# Altium PCB AMPURR.PcbDoc (part 1 of 6)
Units mm, origin at the board's own origin, x right, y up, seen from the top; angles counter-clockwise.
Board outline 100 x 100 mm, 4 copper layers (Top Layer, GND, VDD, Bottom Layer), stack 1.586 mm thick; 522 components, 281 nets, 1527 pads, 2431 vias.
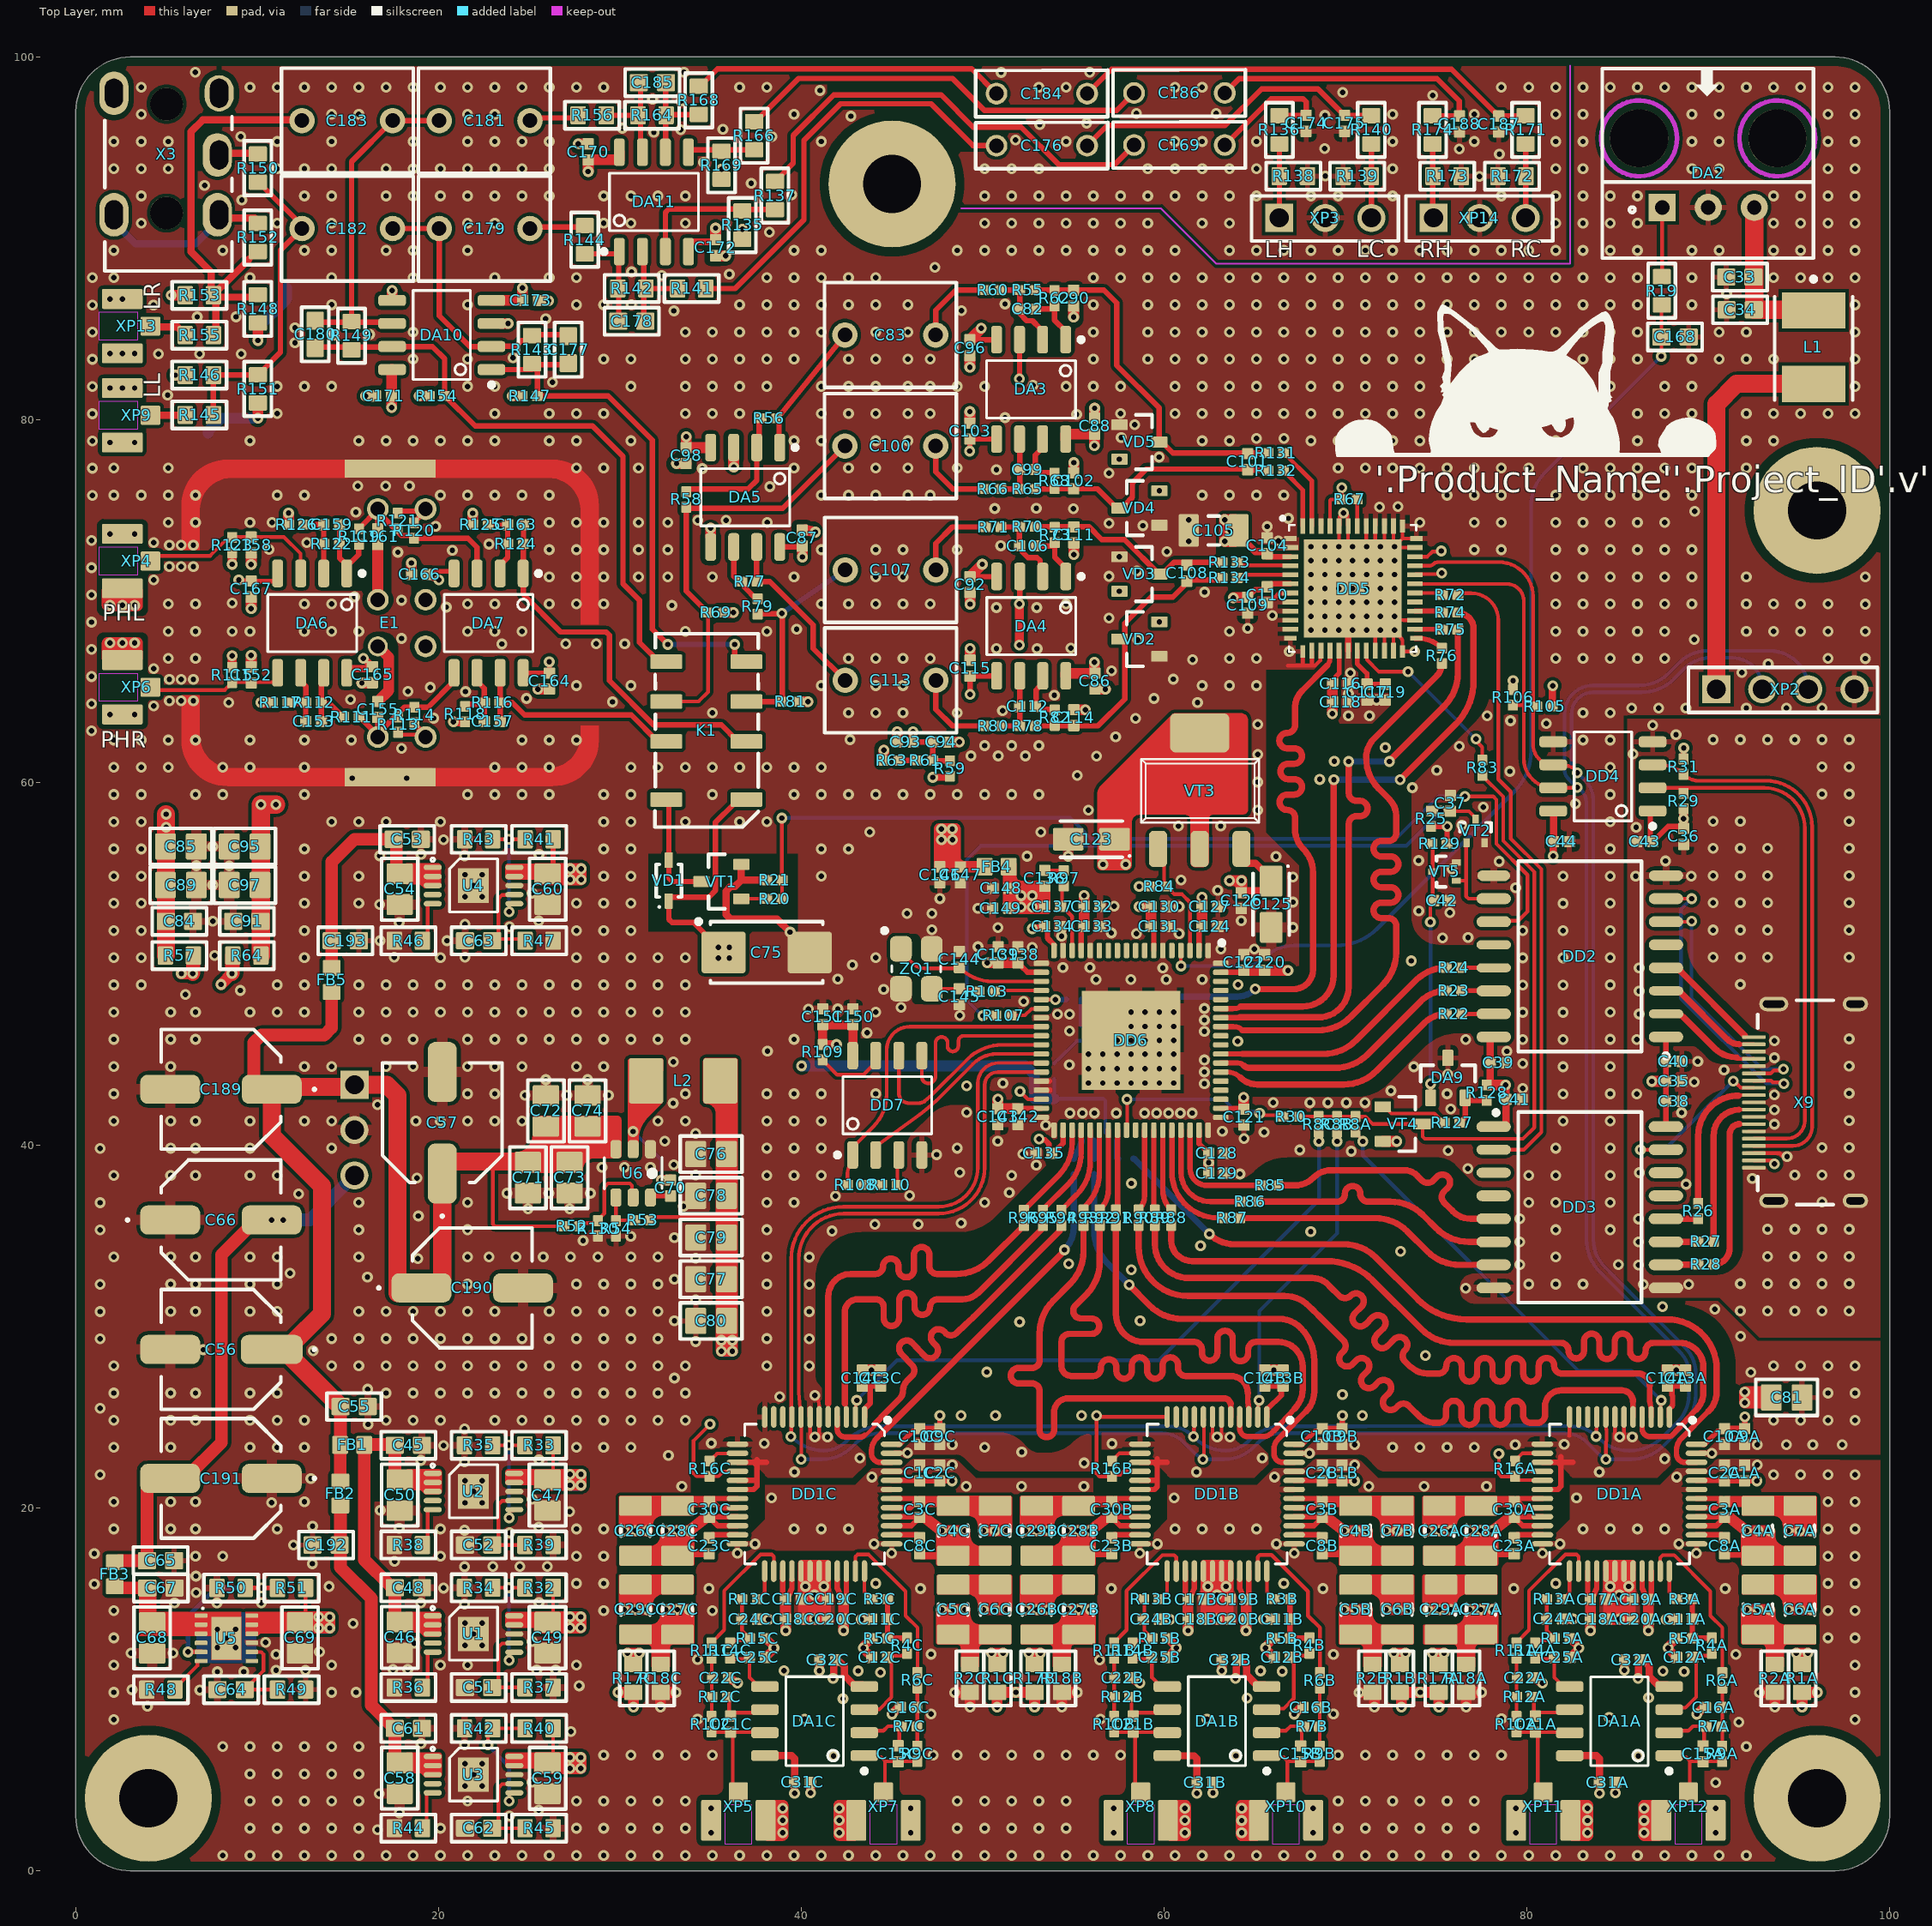
[diagram p0: Top Layer view]
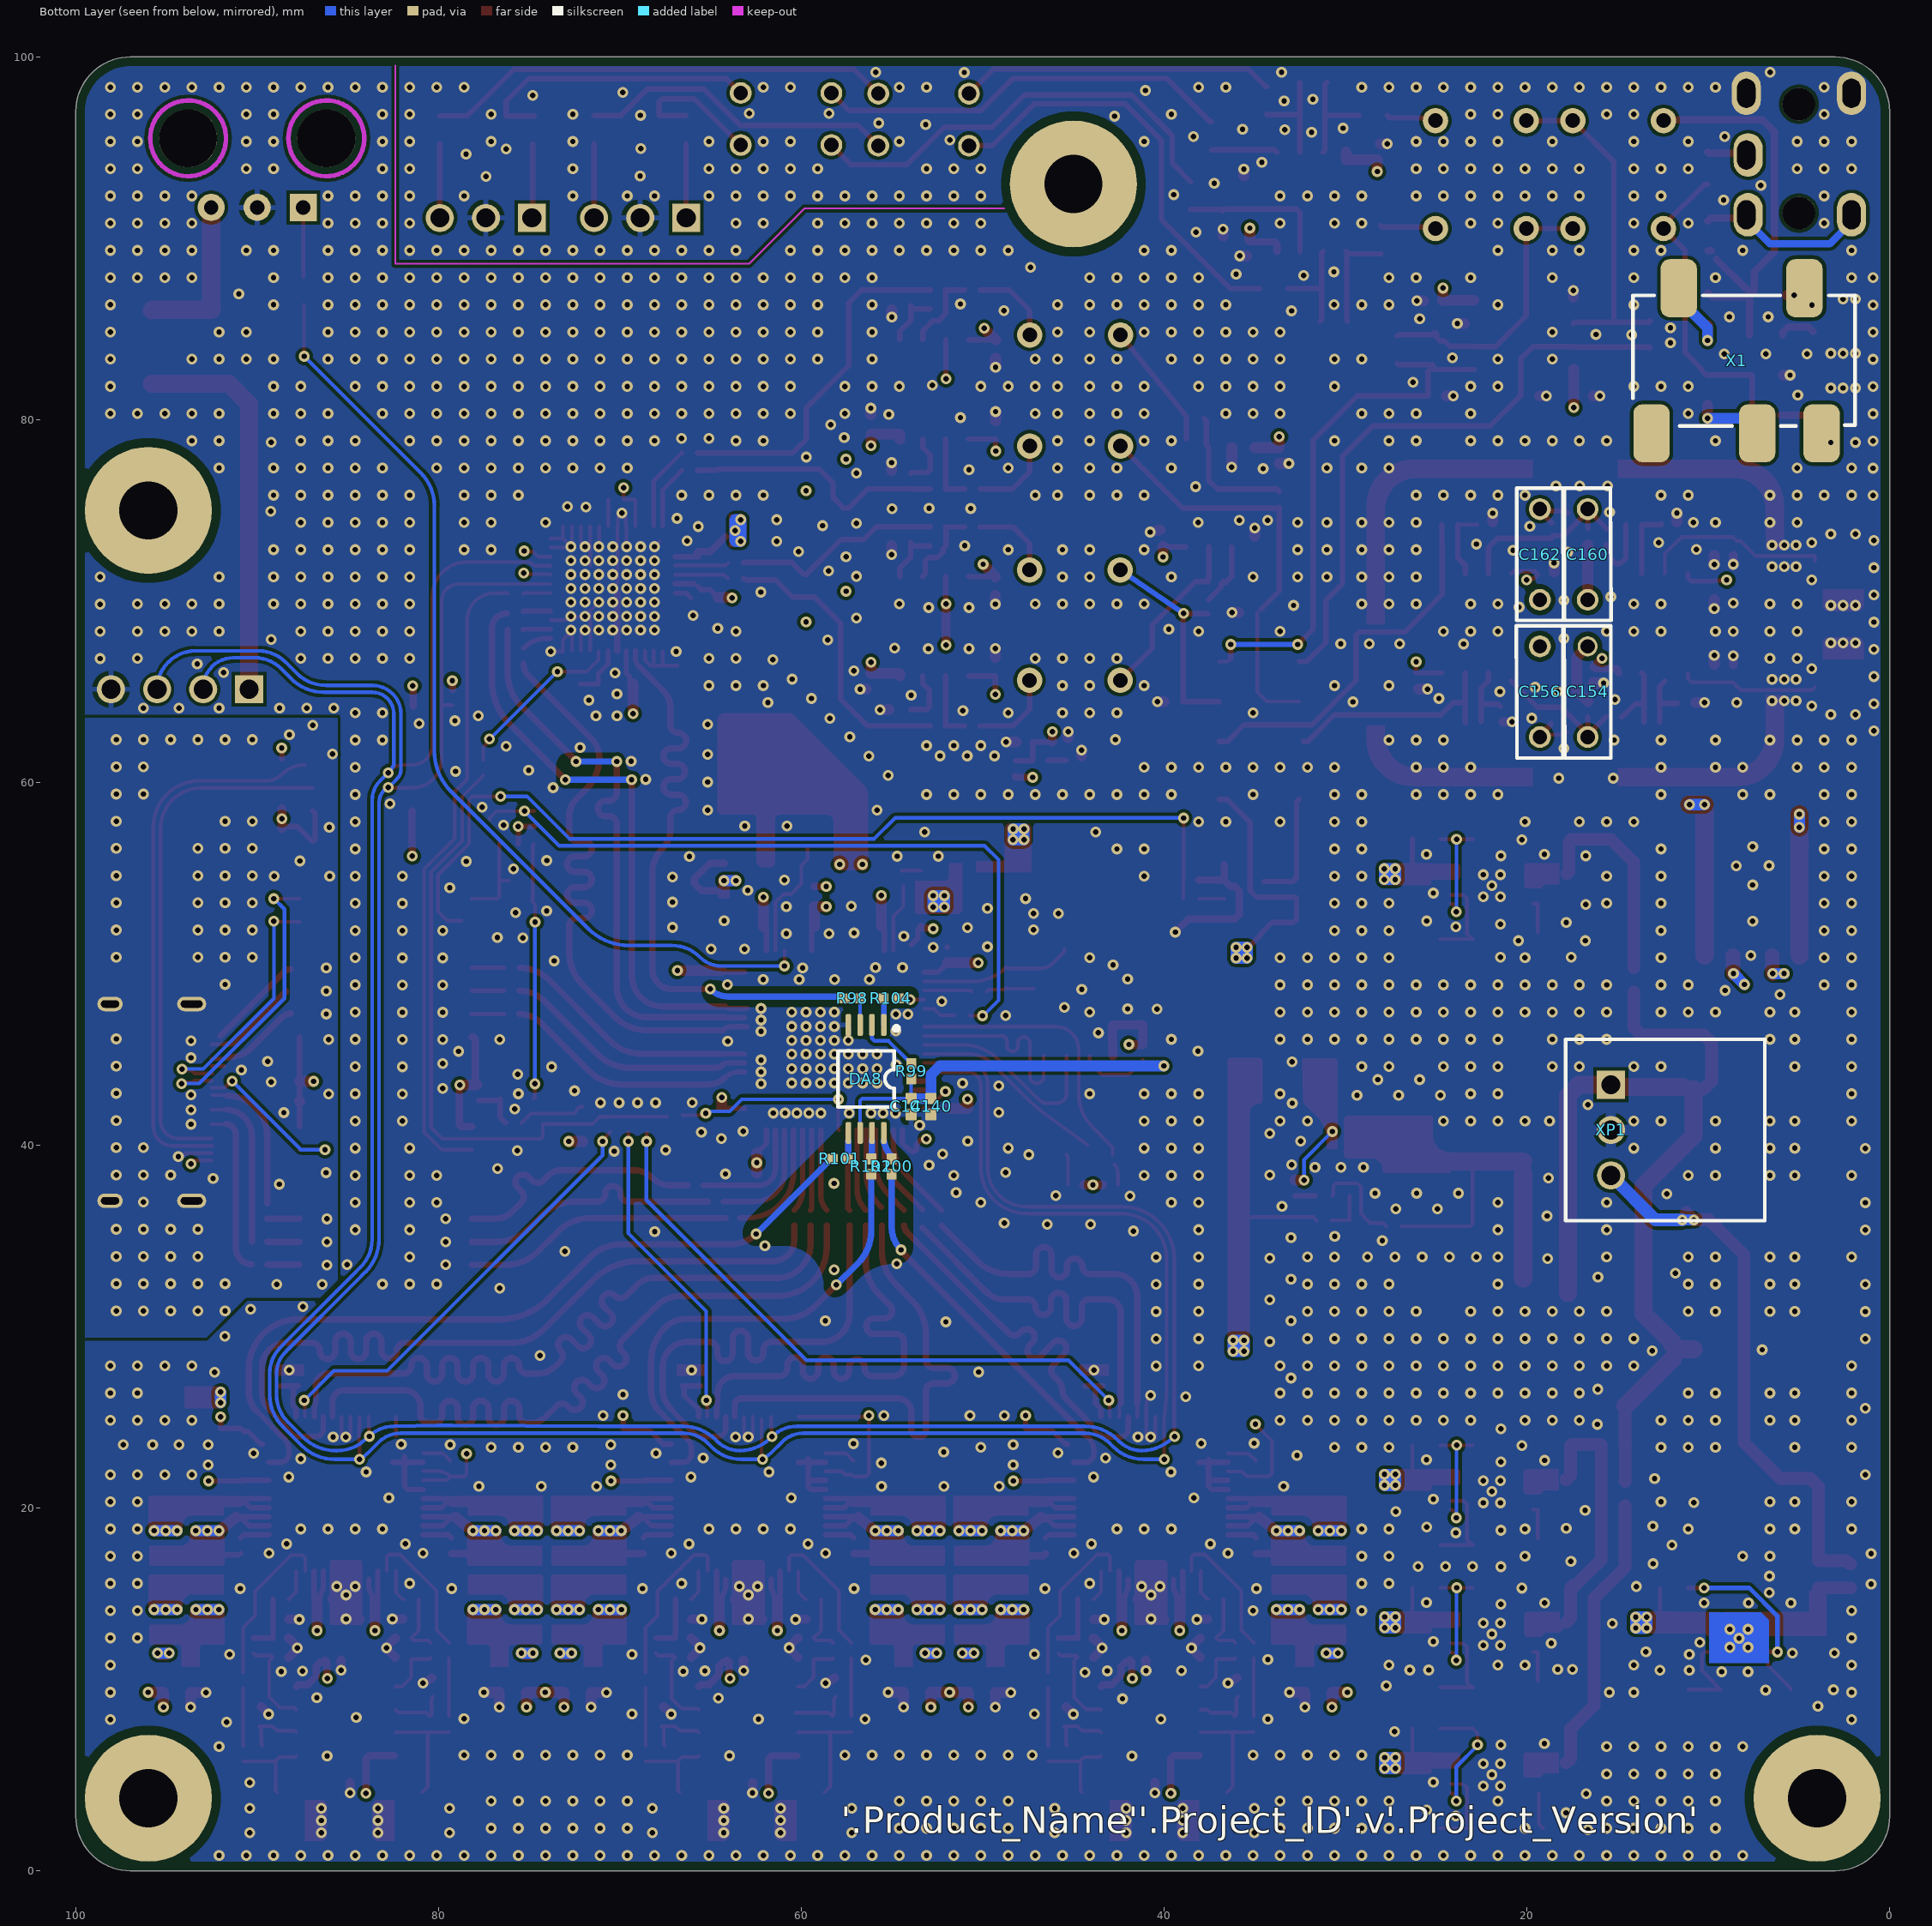
[diagram p1: Bottom Layer view, seen from below]
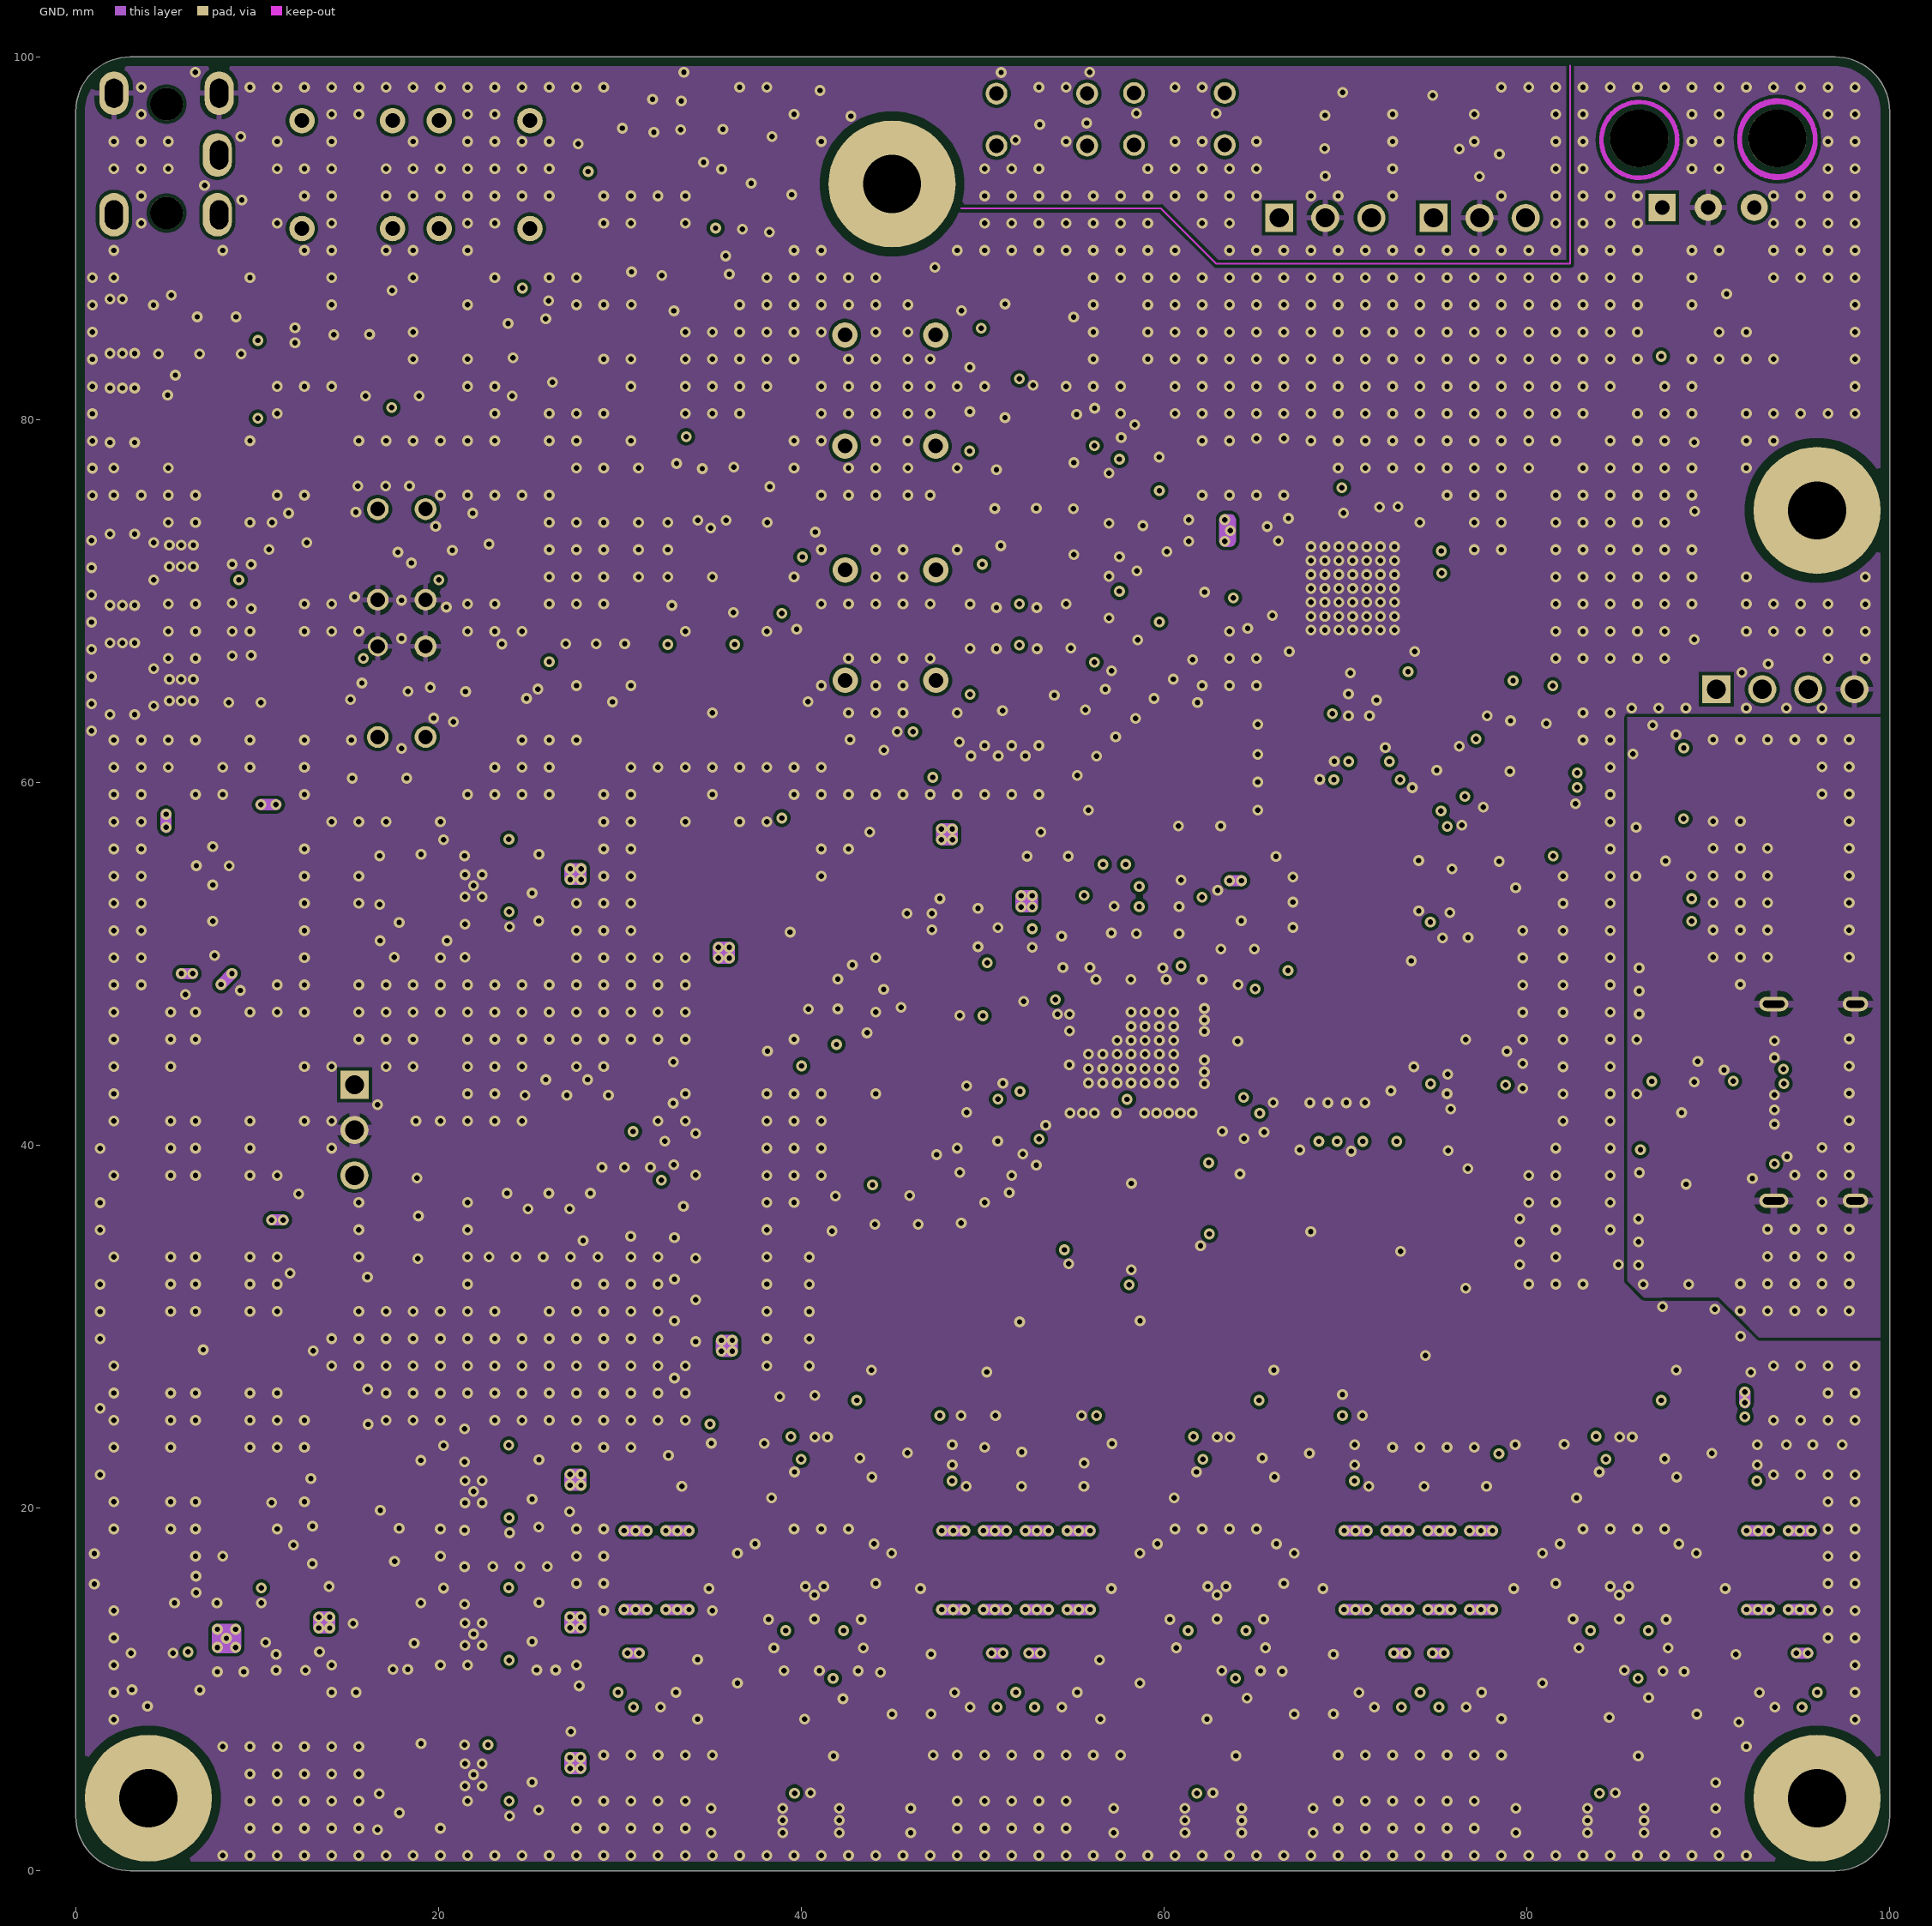
[diagram p2: GND]
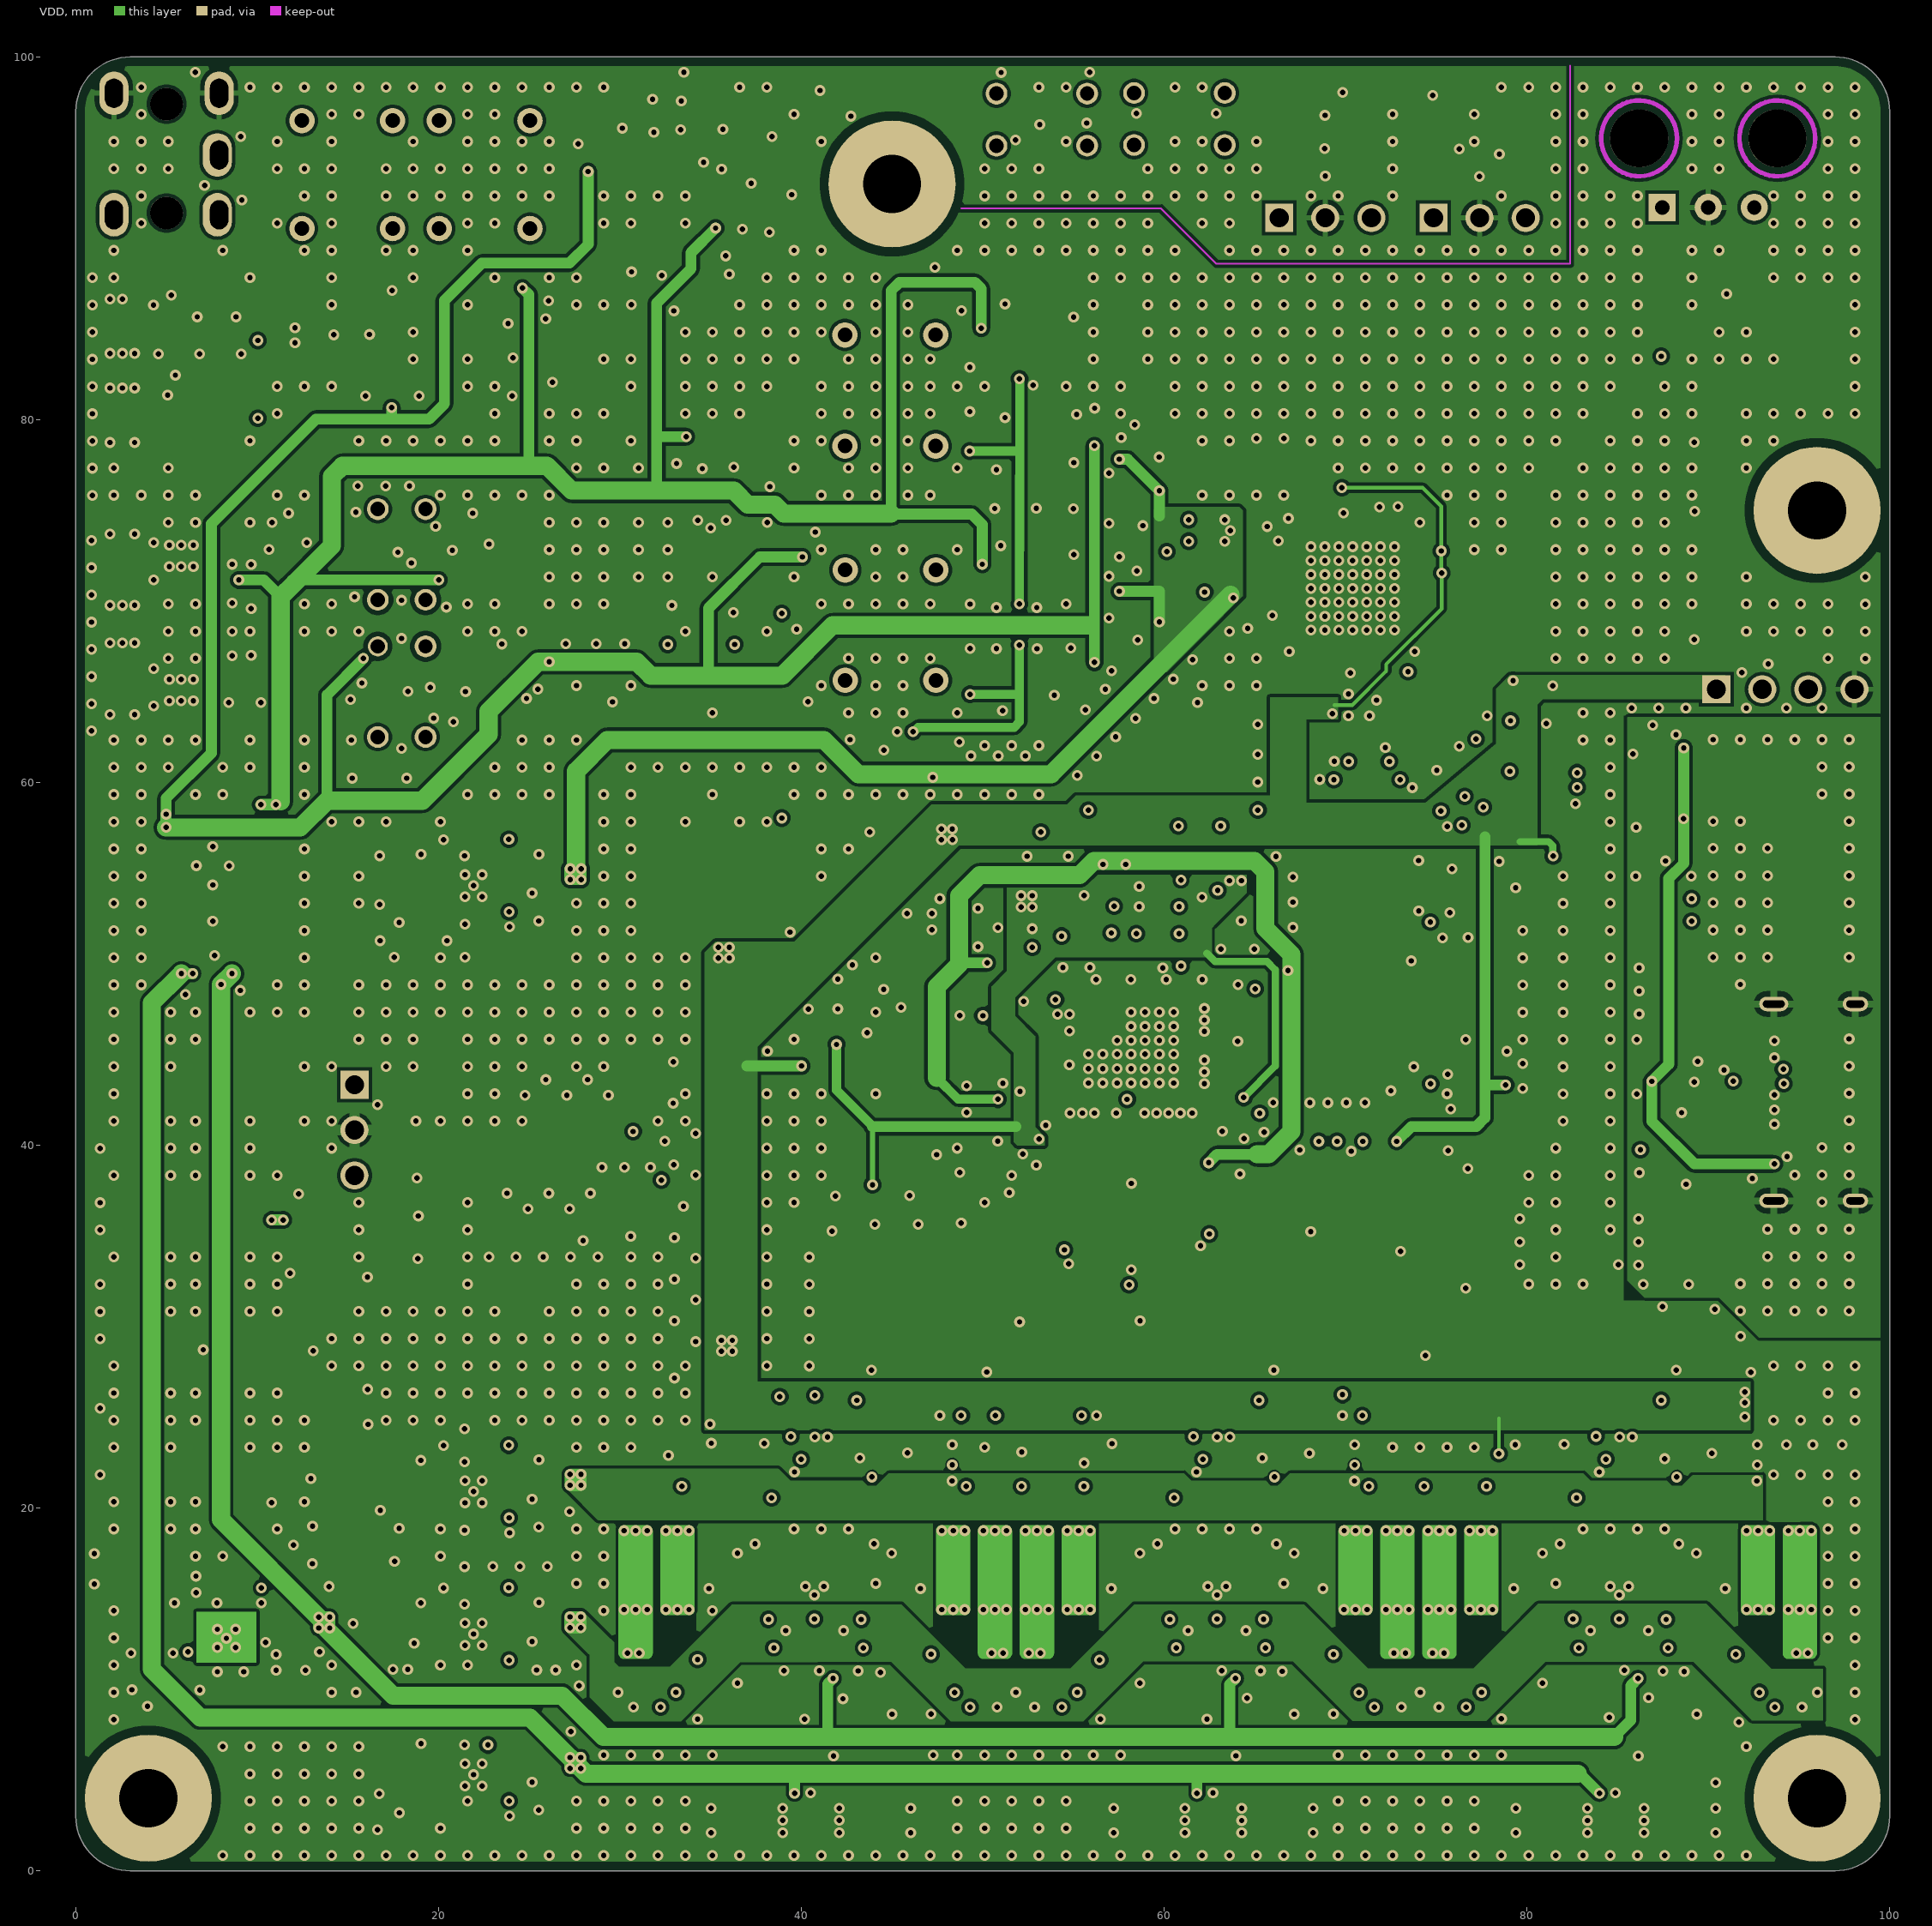
[diagram p3: VDD]
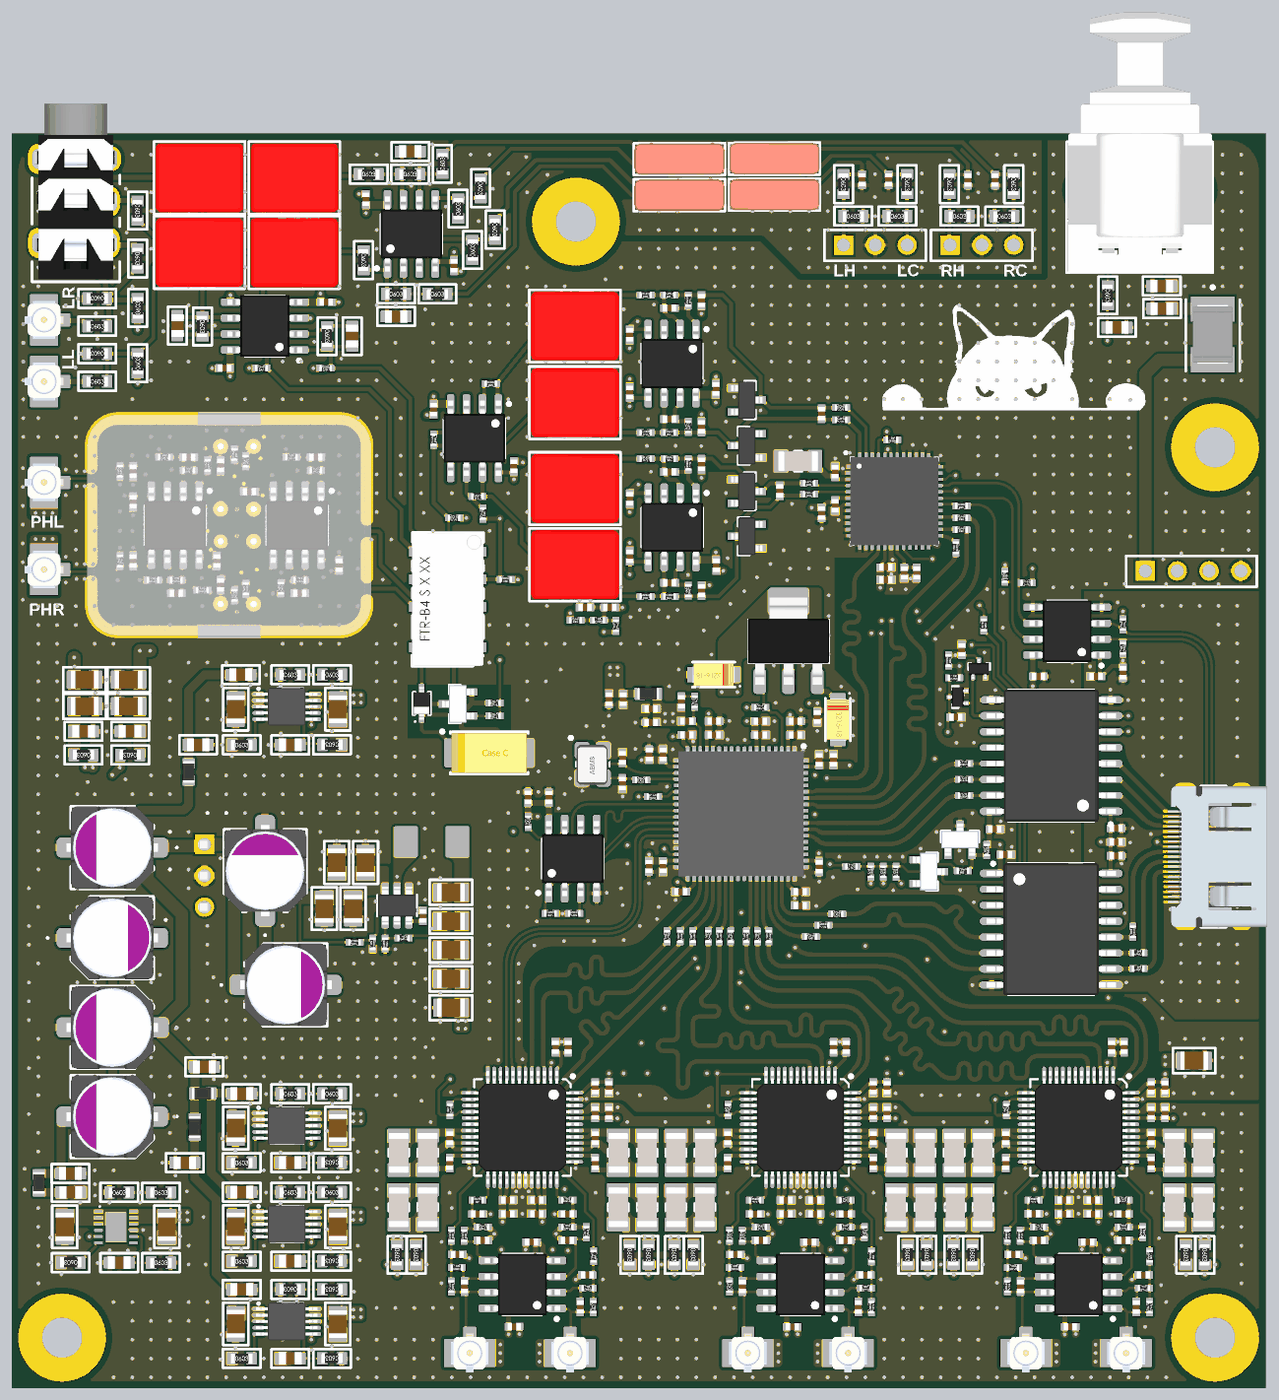
[diagram p8: 3D render of the assembled board from above, using the file's embedded part models]
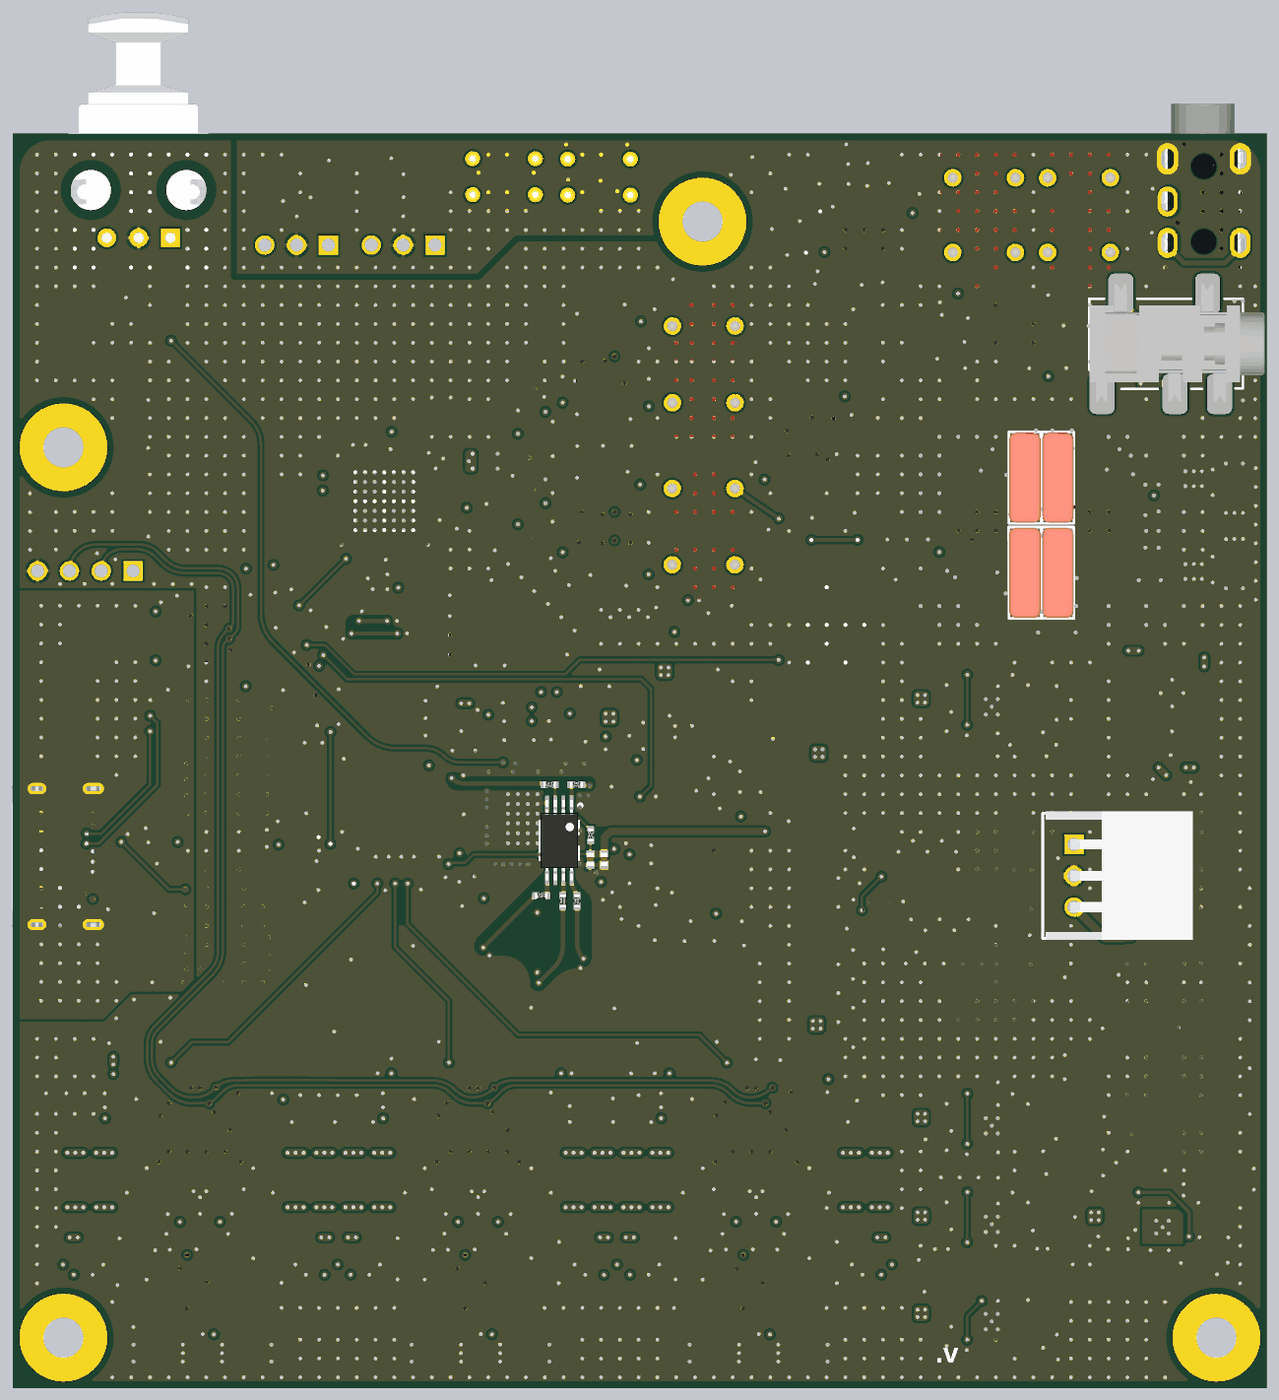
[diagram p9: 3D render of the assembled board from below, using the file's embedded part models]

## Layer stack, top to bottom
Top Solder: solder mask 0.02, Solder Resist, Dk 3.5
Top Layer: signal copper 0.035
Dielectric 2: prepreg 0.2104, PP-006, Dk 4.5
GND: signal copper 0.0152
Dielectric 1: dielectric 1.065, FR-4, Dk 4.5
VDD: signal copper 0.0152
Dielectric 3: prepreg 0.2104, PP-006, Dk 4.5
Bottom Layer: signal copper 0.035
Bottom Solder: solder mask 0.02, Solder Resist, Dk 3.5

## Board outline
0,3 0,97 cw(c3,97) 3,100 97,100 cw(c97,97) 100,97 100,3 cw(c97,3) 97,0 3,0 cw(c3,3)

## Design rules (kind name [scope] priority, off if disabled: settings)
BoardOutlineClearance [All] p1: gap=0.5 ignorepadtopadclearanceinfootprint=FALSE
Clearance [All] p1: gap=0.18 ignorepadtopadclearanceinfootprint=FALSE
Clearance MiddleVoltage [InNetClass('MiddleVoltage')] p2: gap=0.5 ignorepadtopadclearanceinfootprint=FALSE except(0: Arc-Hole Track-Hole SMDPad-Hole THPad-Hole Via-Hole Fill-Hole Poly-Hole Region-Hole Text-Hole; 0.2: Arc-Text Track-Text SMDPad-Text THPad-Text Via-Text Fill-Text Poly-Text Region-Text Text-Text)
Clearance HighVoltage [InNetClass('HighVoltage')] p3: gap=1 ignorepadtopadclearanceinfootprint=FALSE except(0: Arc-Hole Track-Hole SMDPad-Hole THPad-Hole Via-Hole Fill-Hole Poly-Hole Region-Hole Text-Hole; 0.2: Arc-Text Track-Text SMDPad-Text THPad-Text Via-Text Fill-Text Poly-Text Region-Text Text-Text)
ComponentClearance [All] p1: gap=0.1 collisioncheckmode=3 verticalgap=0.1 showdistances=TRUE
Height [All] p1: minheight=0 maxheight=40 prefheight=12.7
HoleSize [All] p1: absolutevalues=TRUE maxlimit=12 minlimit=0.3 maxpercent=80.000 minpercent=20.000
HoleToHoleClearance [All] p1: gap=0.25 allowstackedmicrovias=TRUE
MatchedLengths I2S5 [InNetClass('I2S5')] p1: tolerance=0.3 checknetsindiffpair=FALSE checkdiffpairvsdiffpair=TRUE checkxsignals=TRUE checkothers=TRUE
MatchedLengths QSPI [InNetClass('QSPI')] p2: tolerance=0.1 checknetsindiffpair=FALSE checkdiffpairvsdiffpair=TRUE checkxsignals=TRUE checkothers=TRUE
MatchedLengths I2S4 [InNetClass('I2S4')] p3: tolerance=0.3 checknetsindiffpair=FALSE checkdiffpairvsdiffpair=TRUE checkxsignals=TRUE checkothers=TRUE
MatchedLengths I2S3 [InNetClass('I2S3')] p4: tolerance=0.3 checknetsindiffpair=FALSE checkdiffpairvsdiffpair=TRUE checkxsignals=TRUE checkothers=TRUE
MatchedLengths I2S2 [InNetClass('I2S2')] p5: tolerance=0.3 checknetsindiffpair=FALSE checkdiffpairvsdiffpair=TRUE checkxsignals=TRUE checkothers=TRUE
MatchedLengths I2S1 [InNetClass('I2S1')] p6: tolerance=0.3 checknetsindiffpair=FALSE checkdiffpairvsdiffpair=TRUE checkxsignals=TRUE checkothers=TRUE
MatchedLengths I2S0 [InNetClass('I2S0')] p7: tolerance=0.3 checknetsindiffpair=FALSE checkdiffpairvsdiffpair=TRUE checkxsignals=TRUE checkothers=TRUE
MinimumSolderMaskSliver [All] p1: minsoldermaskwidth=0.1
NetAntennae [All] p1: netantennaetolerance=2
PlaneClearance [All] p1: clearance=0.3
PlaneConnect PlaneConnectMiddleCurrent [InNetClass('MiddleCurrent')] p1: planeconnectstyle=Relief reliefexpansion=0.508 reliefentries=4 reliefconductorwidth=0.5 reliefairgap=0.3
PlaneConnect PlaneHighCurrent [InNetClass('HighCurrent')] p2: planeconnectstyle=Relief reliefexpansion=0.508 reliefentries=4 reliefconductorwidth=0.5 reliefairgap=0.35
PlaneConnect [All] p3: planeconnectstyle=Relief reliefexpansion=0.508 reliefentries=4 reliefconductorwidth=0.3 reliefairgap=0.3
PolygonConnect PolygonConnectMiddleCurrent [All vs InNetClass('MiddleCurrent')] p1: connectstyle=Relief reliefconductorwidth=0.4 reliefentries=4 polygonreliefangle="90 Angle" airgapwidth=0.3
PolygonConnect PolygonHighCurrent [InNetClass('HighCurrent')] p2: connectstyle=Relief reliefconductorwidth=0.5 reliefentries=4 polygonreliefangle="90 Angle" airgapwidth=0.3
PolygonConnect PolygonConnect_Keepout [(ObjectKind = 'Track') And (Layer = 'KeepOutLayer')] p3: connectstyle=Direct reliefconductorwidth=0.254 reliefentries=4 polygonreliefangle="90 Angle" airgapwidth=0.254
PolygonConnect PolygonConnect_Via [IsVia] p4: connectstyle=Direct reliefconductorwidth=0.254 reliefentries=4 polygonreliefangle="90 Angle" airgapwidth=0.254
PolygonConnect [All] p5: thpad.connectstyle=Relief thpad.reliefconductorwidth=0.3 thpad.reliefentries=4 thpad.polygonreliefangle="90 Angle" thpad.airgapwidth=0.25 smdpad.connectstyle=Relief smdpad.reliefconductorwidth=0.3 smdpad.reliefentries=4 smdpad.polygonreliefangle="90 Angle" smdpad.airgapwidth=0.25 via.connectstyle=Direct via.reliefconductorwidth=0.3 via.reliefentries=4 via.polygonreliefangle="90 Angle" via.airgapwidth=0.3
RoutingCorners [All] p1: cornerstyle=45-Degree minsetback=1 maxsetback=3
RoutingVias Power [InNetClass('Power')] p1: holewidth=0.8 width=1.5 viastyle="Through Hole" minholewidth=0.5 minwidth=1 maxholewidth=1.2 maxwidth=3
RoutingVias [All] p2: holewidth=0.3 width=0.6 viastyle="Through Hole" minholewidth=0.2 minwidth=0.3 maxholewidth=3 maxwidth=8
SilkToSilkClearance [All] p1: silktosilkclearance=0
SilkToSolderMaskClearance [IsPad] p1: minsilkscreentomaskgap=0.05 clearancetoexposedcopper=TRUE
SolderMaskExpansion SolderMaskExpansion_VIA [IsVia] p1: expansion=-3 istentingtop=TRUE useseparateexpansions=TRUE expansionbottom=-3 istentingbottom=TRUE
SolderMaskExpansion [All] p2: expansion=0.05 istentingtop=FALSE
Width Width_50_r [InNetClass('I2S0') or InNetClass('I2S1') or InNetClass('I2S2') or InNetClass('I2S3') or InNetClass('I2S4') or InNetClass('MCLK')] p1: maxlimit=0.4 minlimit=0.1 preferedwidth=0.35 toplayer_minwidth=0.2 midlayer1_prefwidth=0.268 midlayer2_prefwidth=0.268 bottomlayer_minwidth=0.2 impedanceprofiledriven=TRUE impedanceprofileid={838E95F1-A316-4909-9744-1A738FEB77C5} impedanceprofilevalue=50.000000 minimp=50.000000 maximp=50.000000 favimp=50.000000
Width Width_ANT [InNetClass('Anthenna')] p2: maxlimit=1.641 minlimit=0.2 preferedwidth=1.641
Width WidthMiddleCurrent [InNetClass('MiddleCurrent')] p3: maxlimit=2 minlimit=0.35 preferedwidth=0.5
Width WidthHighCurrent [InNetClass('HighCurrent')] p4: maxlimit=5 minlimit=0.5 preferedwidth=1
19 further rules are at their usual default settings.

## Classes and differential pairs
component class U_LINE_PREAMP: C169 C170 C171 C172 C173 C174 C175 C176 C177 C178 C179 C180 C181 C182 C183 C184 C185 C186 C187 C188 DA10 DA11 DA? R135 R136 R137 R138 R139 R140 R141 R142 R143 R144 R145 R146 R147 R148 R149 R150 R151 R152 R153 R154 R155 R156 R164 R166 R168 R169 R171 R172 R173 R174 X1 X3 XP3 XP9 XP13 XP14
net class I2S3: DAC_BCK_3 DAC_DIN_3 DAC_LRCK_3
net class MCLK: MCLK
net class QSPI: SPI_MISO_M SPI_MOSI_M SPI_SCLK_M
net class I2S4: IN2_BCLK IN2_LRCLK IN2_SDATA NetDD5_16
net class I2S2: DAC_BCK_2 DAC_DIN_2 DAC_LRCK_2 NetDD1A_46
net class I2S1: DAC_BCK_1 DAC_DIN_1 DAC_LRCK_1 NetDD1B_46
net class I2S0: DAC_BCK_0 DAC_DIN_0 DAC_LRCK_0 NetDD1C_46
net class I2S5: IN1_BCLK IN1_LRCLK IN1_SDATA
channel class DAC_AK4493SEQ: U_DAC_AK4493SEQA U_DAC_AK4493SEQB U_DAC_AK4493SEQC
component class U_POWER: C45 C46 C47 C48 C49 C50 C51 C52 C53 C54 C55 C56 C57 C58 C59 C60 C61 C62 C63 C64 C65 C66 C67 C68 C69 C70 C71 C72 C73 C74 C75 C76 C77 C78 C79 C80 C81 C189 C190 C191 C192 C193 FB1 FB2 FB3 FB5 L2 R32 R33 R34 R35 R36 R37 R38 R39 R40 R41 R42 R43 R44 R45 R46 R47 R48 R49 R50 R51 R52 R53 R54 R130 U1 U2 U3 U4 U5 U6
component class U_PHONO_PREAMP: C152 C153 C154 C155 C156 C157 C158 C159 C160 C161 C162 C163 C164 C165 C166 C167 DA6 DA7 E1 R111 R112 R113 R114 R115 R116 R117 R118 R119 R120 R121 R122 R123 R124 R125 R126
component class U_DAC_AK4493SEQC: C1C C2C C3C C4C C5C C6C C7C C8C C9C C10C C11C C12C C13C C14C C15C C16C C17C C18C C19C C20C C21C C22C C23C C24C C25C C26C C27C C28C C29C C30C C31C C32C DA1C DD1C IC?C R1C R2C R3C R4C R5C R6C R7C R8C R9C R10C R11C R12C R13C R14C R15C R16C R17C R18C
component class U_DAC_AK4493SEQB: C1B C2B C3B C4B C5B C6B C7B C8B C9B C10B C11B C12B C13B C14B C15B C16B C17B C18B C19B C20B C21B C22B C23B C24B C25B C26B C27B C28B C29B C30B C31B C32B DA1B DD1B IC?B R1B R2B R3B R4B R5B R6B R7B R8B R9B R10B R11B R12B R13B R14B R15B R16B R17B R18B
component class U_DAC_AK4493SEQA: C1A C2A C3A C4A C5A C6A C7A C8A C9A C10A C11A C12A C13A C14A C15A C16A C17A C18A C19A C20A C21A C22A C23A C24A C25A C26A C27A C28A C29A C30A C31A C32A DA1A DD1A IC?A R1A R2A R3A R4A R5A R6A R7A R8A R9A R10A R11A R12A R13A R14A R15A R16A R17A R18A
component class U_ADC_AK5572: C82 C83 C84 C85 C86 C87 C88 C89 C90 C91 C92 C93 C94 C95 C96 C97 C98 C99 C100 C101 C102 C103 C104 C105 C106 C107 C108 C109 C110 C111 C112 C113 C114 C115 C116 C117 C118 C119 DA3 DA4 DA5 DD5 R55 R56 R57 R58 R59 R60 R61 R62 R63 R64 R65 R66 R67 R68 R69 R70 R71 R72 R73 R74 R75 R76 R77 R78 R79 R80 R81 R82 R83 R131 R132 R133 R134 VD2 VD3 VD4 VD5
component class U_ADAU1452KCPZ: C120 C121 C122 C123 C124 C125 C126 C127 C128 C129 C130 C131 C132 C133 C134 C135 C136 C137 C138 C139 C140 C141 C142 C143 C144 C145 C146 C147 C148 C149 C150 C151 DA8 DD6 DD7 FB4 IC? R84 R85 R86 R87 R88 R89 R90 R91 R92 R93 R94 R95 R96 R97 R98 R99 R100 R101 R102 R103 R104 R105 R106 R107 R108 R109 R110 VT3 Y? ZQ1
component class AMPURR: C33 C34 C35 C36 C37 C38 C39 C40 C41 C42 C43 C44 C168 DA2 DA9 DD2 DD3 DD4 K1 L1 R19 R20 R21 R22 R23 R24 R25 R26 R27 R28 R29 R30 R31 R127 R128 R129 VD1 VT1 VT2 VT4 VT5 X9 XP1 XP2 XP4 XP5 XP6 XP7 XP8 XP10 XP11 XP12

## Components (designator, comment, footprint, x,y, rotation, side; value= is the part's Value field where it differs from the comment)
C1A "10uF" C0402(1005)#1 92.006,21.93 r90 top (schematic designator C1)
C1B "10uF" C0402(1005)#1 69.818,21.93 r90 top (schematic designator C1)
C1C "10uF" C0402(1005)#1 46.53,21.93 r90 top (schematic designator C1)
C2A "0.1uF" C0402(1005)#1 90.906,21.93 r90 top (schematic designator C2)
C2B "0.1uF" C0402(1005)#1 68.718,21.93 r90 top (schematic designator C2)
C2C "0.1uF" C0402(1005)#1 47.63,21.93 r90 top (schematic designator C2)
C3A "0.1uF" C0402(1005)#1 90.906,19.916 r270 top (schematic designator C3)
C3B "0.1uF" C0402(1005)#1 68.718,19.916 r270 top (schematic designator C3)
C3C "0.1uF" C0402(1005)#1 46.53,19.92 r270 top (schematic designator C3)
C4A "100uF" C1206(3216) 92.75,18.745 r90 top (schematic designator C4)
C4B "100uF" C1206(3216) 70.562,18.745 r90 top (schematic designator C4)
C4C "100uF" C1206(3216) 48.378,18.745 r90 top (schematic designator C4)
C5A "100uF" C1206(3216) 92.75,14.4 r90 top (schematic designator C5)
C5B "100uF" C1206(3216) 70.562,14.4 r90 top (schematic designator C5)
C5C "100uF" C1206(3216) 48.378,14.4 r90 top (schematic designator C5)
C6A "100uF" C1206(3216) 95.056,14.4 r90 top (schematic designator C6)
C6B "100uF" C1206(3216) 72.868,14.4 r90 top (schematic designator C6)
C6C "100uF" C1206(3216) 50.68,14.4 r90 top (schematic designator C6)
C7A "100uF" C1206(3216) 95.056,18.745 r90 top (schematic designator C7)
C7B "100uF" C1206(3216) 72.868,18.745 r90 top (schematic designator C7)
C7C "100uF" C1206(3216) 50.68,18.745 r90 top (schematic designator C7)
C8A "10uF" C0402(1005)#1 90.906,17.916 r90 top (schematic designator C8)
C8B "10uF" C0402(1005)#1 68.718,17.916 r90 top (schematic designator C8)
C8C "10uF" C0402(1005)#1 46.53,17.92 r90 top (schematic designator C8)
C9A "10uF" C0402(1005)#1 92.006,23.942 r270 top (schematic designator C9)
C9B "10uF" C0402(1005)#1 69.818,23.941 r270 top (schematic designator C9)
C9C "10uF" C0402(1005)#1 47.63,23.941 r270 top (schematic designator C9)
C10A "0.1uF" C0402(1005)#1 90.906,23.941 r270 top (schematic designator C10)
C10B "0.1uF" C0402(1005)#1 68.718,23.941 r270 top (schematic designator C10)
C10C "0.1uF" C0402(1005)#1 46.53,23.941 r270 top (schematic designator C10)
C11A "33nF" C0402(1005)#1 88.701,13.864 r180 top (schematic designator C11)
C11B "33nF" C0402(1005)#1 66.513,13.864 r180 top (schematic designator C11)
C11C "33nF" C0402(1005)#1 44.325,13.864 r180 top (schematic designator C11)
C12A "4.7nF" C0402(1005)#1 88.701,11.764 r0 top (schematic designator C12)
C12B "4.7nF" C0402(1005)#1 66.513,11.764 r0 top (schematic designator C12)
C12C "4.7nF" C0402(1005)#1 44.325,11.764 r0 top (schematic designator C12)
C13A "1uF" C0402(1005)#1 88.746,27.161 r90 top (schematic designator C13)
C13B "1uF" C0402(1005)#1 66.558,27.161 r90 top (schematic designator C13)
C13C "1uF" C0402(1005)#1 44.37,27.161 r90 top (schematic designator C13)
C14A "0.1uF" C0402(1005)#1 87.745,27.161 r90 top (schematic designator C14)
C14B "0.1uF" C0402(1005)#1 65.557,27.161 r90 top (schematic designator C14)
C14C "0.1uF" C0402(1005)#1 43.365,27.161 r90 top (schematic designator C14)
C15A "1.5nF" C0402(1005)#1 89.718,6.446 r270 top (schematic designator C15)
C15B "1.5nF" C0402(1005)#1 67.53,6.446 r270 top (schematic designator C15)
C15C "1.5nF" C0402(1005)#1 45.342,6.45 r270 top (schematic designator C15)
C16A "10nF" C0402(1005)#1 90.283,8.996 r0 top (schematic designator C16)
C16B "10nF" C0402(1005)#1 68.095,8.996 r0 top (schematic designator C16)
C16C "10nF" C0402(1005)#1 45.907,9 r0 top (schematic designator C16)
C17A "0.1uF" C0402(1005)#1 83.946,14.965 r0 top (schematic designator C17)
C17B "0.1uF" C0402(1005)#1 61.758,14.965 r0 top (schematic designator C17)
C17C "0.1uF" C0402(1005)#1 39.57,14.969 r0 top (schematic designator C17)
C18A "10uF" C0402(1005)#1 83.946,13.865 r0 top (schematic designator C18)
C18B "10uF" C0402(1005)#1 61.758,13.865 r0 top (schematic designator C18)
C18C "10uF" C0402(1005)#1 39.57,13.869 r0 top (schematic designator C18)
C19A "0.1uF" C0402(1005)#1 86.268,14.965 r0 top (schematic designator C19)
C19B "0.1uF" C0402(1005)#1 64.08,14.965 r0 top (schematic designator C19)
C19C "0.1uF" C0402(1005)#1 41.892,14.969 r0 top (schematic designator C19)
C20A "10uF" C0402(1005)#1 86.268,13.865 r0 top (schematic designator C20)
C20B "10uF" C0402(1005)#1 64.08,13.865 r0 top (schematic designator C20)
C20C "10uF" C0402(1005)#1 41.892,13.869 r0 top (schematic designator C20)
C21A "1.5nF" C0402(1005)#1 80.48,8.085 r270 top (schematic designator C21)
C21B "1.5nF" C0402(1005)#1 58.292,8.085 r270 top (schematic designator C21)
C21C "1.5nF" C0402(1005)#1 36.105,8.085 r270 top (schematic designator C21)
C22A "10nF" C0402(1005)#1 79.915,10.635 r180 top (schematic designator C22)
C22B "10nF" C0402(1005)#1 57.727,10.635 r180 top (schematic designator C22)
C22C "10nF" C0402(1005)#1 35.539,10.635 r180 top (schematic designator C22)
C23A "10uF" C0402(1005)#1 79.302,17.916 r270 top (schematic designator C23)
C23B "10uF" C0402(1005)#1 57.114,17.916 r270 top (schematic designator C23)
C23C "10uF" C0402(1005)#1 34.926,17.92 r270 top (schematic designator C23)
C24A "33nF" C0402(1005)#1 81.526,13.885 r0 top (schematic designator C24)
C24B "33nF" C0402(1005)#1 59.294,13.864 r0 top (schematic designator C24)
C24C "33nF" C0402(1005)#1 37.15,13.864 r0 top (schematic designator C24)
C25A "4.7nF" C0402(1005)#1 81.951,11.764 r180 top (schematic designator C25)
C25B "4.7nF" C0402(1005)#1 59.763,11.764 r180 top (schematic designator C25)
C25C "4.7nF" C0402(1005)#1 37.576,11.764 r180 top (schematic designator C25)
C26A "100uF" C1206(3216) 75.18,18.745 r270 top (schematic designator C26)
C26B "100uF" C1206(3216) 52.984,14.4 r270 top (schematic designator C26)
C26C "100uF" C1206(3216) 30.861,18.745 r270 top (schematic designator C26)
C27A "100uF" C1206(3216) 77.473,14.4 r270 top (schematic designator C27)
C27B "100uF" C1206(3216) 55.285,14.4 r270 top (schematic designator C27)
C27C "100uF" C1206(3216) 33.168,14.4 r270 top (schematic designator C27)
C28A "100uF" C1206(3216) 77.473,18.745 r270 top (schematic designator C28)
C28B "100uF" C1206(3216) 55.285,18.745 r270 top (schematic designator C28)
C28C "100uF" C1206(3216) 33.168,18.745 r270 top (schematic designator C28)
C29A "100uF" C1206(3216) 75.268,14.4 r270 top (schematic designator C29)
C29B "100uF" C1206(3216) 52.984,18.745 r270 top (schematic designator C29)
C29C "100uF" C1206(3216) 30.861,14.4 r270 top (schematic designator C29)
C30A "0.1uF" C0402(1005)#1 79.306,19.916 r270 top (schematic designator C30)
C30B "0.1uF" C0402(1005)#1 57.118,19.916 r270 top (schematic designator C30)
C30C "0.1uF" C0402(1005)#1 34.93,19.92 r270 top (schematic designator C30)
C31A "0.1uF" C0402(1005)#1 84.446,4.868 r180 top (schematic designator C31)
C31B "0.1uF" C0402(1005)#1 62.258,4.868 r180 top (schematic designator C31)
C31C "0.1uF" C0402(1005)#1 40.071,4.872 r180 top (schematic designator C31)
C32A "0.1uF" C0402(1005)#1 85.831,11.622 r180 top (schematic designator C32)
C32B "0.1uF" C0402(1005)#1 63.643,11.622 r180 top (schematic designator C32)
C32C "0.1uF" C0402(1005)#1 41.455,11.622 r180 top (schematic designator C32)
C33 "0.1uF" C0603(1608) 91.746,87.862 r180 top
C34 "10uF" C0603(1608) 91.764,86.062 r180 top
C35 "10uF" C0402(1005)#1 88.102,43.523 r180 top
C36 "10uF" C0402(1005)#1 88.645,57.023 r90 top
C37 "0.1uF" C0402(1005)#1 75.788,58.852 r90 top
C38 "0.1uF" C0402(1005)#1 88.102,42.423 r180 top
C39 "0.1uF" C0402(1005)#1 78.426,44.545 r180 top
C40 "0.1uF" C0402(1005)#1 88.102,44.623 r180 top
C41 "0.1uF" C0402(1005)#1 79.293,42.525 r180 top
C42 "10uF" C0402(1005)#1 75.313,53.486 r180 top
C43 "0.1uF" C0402(1005)#1 86.499,56.737 r0 top
C44 "0.1uF" C0402(1005)#1 81.906,56.737 r180 top
C45 "0.1uF" C0603(1608) 18.334,23.458 r180 top
C46 "10uF" C0805(2012)#1 17.854,12.862 r270 top
C47 "10uF" C0805(2012)#2 26.005,20.708 r270 top
C48 "0.1uF" C0603(1608) 18.334,15.602 r180 top
C49 "10uF" C0805(2012)#2 26.005,12.852 r270 top
C50 "10uF" C0805(2012)#1 17.854,20.713 r270 top
C51 "4.7uF" C0603(1608) 22.205,10.102 r180 top
C52 "4.7uF" C0603(1608) 22.205,17.958 r180 top
C53 "0.1uF" C0603(1608) 18.269,56.867 r180 top
C54 "10uF" C0805(2012)#1 17.856,54.117 r270 top
C55 "0.1uF" C0603(1608) 15.344,25.592 r180 top
C56 "47uF" "CAP 6.3x6"#1 8,28.741 r90 top
C57 "47uF" "CAP 6.3x6"#2 20.2,41.24 r0 top
C58 "10uF" C0805(2012)#1 17.856,5.102 r270 top
C59 "10uF" C0805(2012)#2 26.007,5.095 r270 top
C60 "10uF" C0805(2012)#2 26.007,54.117 r270 top
C61 "0.1uF" C0603(1608) 18.336,7.845 r180 top
C62 "4.7uF" C0603(1608) 22.207,2.345 r180 top
C63 "4.7uF" C0603(1608) 22.207,51.275 r180 top
C64 "4.7uF" C0603(1608) 8.558,9.987 r0 top
C65 "0.1uF" C0603(1608) 4.67,17.096 r0 top
C66 "47uF" "CAP 6.3x6"#2 8,35.88 r270 top
C67 "0.1uF" C0603(1608) 4.687,15.589 r0 top
C68 "10uF" C0805(2012)#1 4.208,12.839 r90 top
C69 "10uF" C0805(2012)#2 12.358,12.839 r90 top
C70 "0.1uF" C0402(1005)#1 32.79,37.64 r90 top
C71 "0.1uF" C0805(2012)#1 24.923,38.211 r90 top
C72 "10uF" C0805(2012)#1 25.913,41.894 r90 top
C73 "10uF" C0805(2012)#1 27.223,38.211 r270 top
C74 "10uF" C0805(2012)#1 28.213,41.894 r90 top
C75 "47uF" CASE_C(6032) 38.083,50.632 r0 top
C76 "10uF" C0805(2012)#1 35.027,39.513 r180 top
C77 "10uF" C0805(2012)#1 35.027,32.613 r180 top
C78 "10uF" C0805(2012)#1 35.027,37.213 r180 top
C79 "10uF" C0805(2012)#1 35.027,34.913 r180 top
C80 "10uF" C0805(2012)#1 35.027,30.313 r180 top
C81 "10uF" C0805(2012)#1 94.326,26.09 r0 top
C82 "1nF" C0402(1005)#1 52.462,86.103 r180 top
C83 "2.2uF" WIMA5 44.905,84.676 r0 top
C84 "0.1uF" C0603(1608) 5.709,52.347 r0 top
C85 "10uF" C0805(2012)#1 5.789,56.472 r0 top
C86 "0.1uF" C0402(1005)#1 56.188,65.586 r90 top
C87 "0.1uF" C0402(1005)#1 40.046,73.479 r270 top
C88 "0.1uF" C0402(1005)#1 56.174,79.646 r270 top
C89 "10uF" C0805(2012)#1 5.794,54.348 r0 top
C90 "100pF" C0402(1005)#1 55.016,86.705 r270 top
C91 "0.1uF" C0603(1608) 9.428,52.347 r0 top
C92 "0.1uF" C0402(1005)#1 49.3,70.906 r270 top
C93 "10uF" C0402(1005)#1 45.725,62.229 r0 top
C94 "0.1uF" C0402(1005)#1 47.698,62.229 r180 top
C95 "10uF" C0805(2012)#1 9.307,56.472 r0 top
C96 "0.1uF" C0402(1005)#1 49.293,83.968 r270 top
C97 "10uF" C0805(2012)#1 9.307,54.348 r0 top
C98 "0.1uF" C0402(1005)#1 33.646,78.02 r270 top
C99 "1nF" C0402(1005)#1 52.462,77.253 r180 top
C100 "2.2uF" WIMA5 44.905,78.552 r0 top
C101 "15nF" C0402(1005)#1 64.606,77.685 r270 top
C102 "100pF" C0402(1005)#1 55.016,76.633 r90 top
C103 "0.1uF" C0402(1005)#1 49.293,79.375 r270 top
C104 "0.1uF" C0402(1005)#1 65.683,73.054 r90 top
C105 "100uF" C1206(3216) 62.732,73.895 r0 top
C106 "1nF" C0402(1005)#1 52.469,73.043 r180 top
C107 "2.2uF" WIMA5 44.919,71.716 r0 top
C108 "15nF" C0402(1005)#1 61.261,71.539 r270 top
C109 "10uF" C0402(1005)#1 64.605,69.769 r90 top
C110 "0.1uF" C0402(1005)#1 65.683,70.352 r90 top
C111 "100pF" C0402(1005)#1 55.023,73.645 r270 top
C112 "1nF" C0402(1005)#1 52.469,64.193 r180 top
C113 "2.2uF" WIMA5 44.919,65.633 r0 top
C114 "100pF" C0402(1005)#1 55.023,63.573 r90 top
C115 "0.1uF" C0402(1005)#1 49.3,66.308 r270 top
C116 "0.1uF" C0402(1005)#1 69.73,65.441 r180 top
C117 "0.1uF" C0402(1005)#1 71.191,64.987 r270 top
C118 "10uF" C0402(1005)#2 69.73,64.444 r180 top
C119 "10uF" C0402(1005)#1 72.191,64.987 r270 top
C120 "0.1uF" C0402(1005)#1 65.543,50.08 r270 top
C121 "0.1uF" C0402(1005)#1 64.404,41.549 r270 top
C122 "10nf" C0402(1005)#1 64.404,50.08 r270 top value=10nF
C123 "10uF" CASE_A(3216) 55.992,56.876 r180 top
C124 "0.1uF" C0402(1005)#1 62.526,52.06 r0 top
C125 "10uF" CASE_A(3216) 65.906,53.287 r270 top
C126 "10uF" C0402(1005)#1 64.261,53.487 r90 top
C127 "10uF" C0402(1005)#1 62.526,53.157 r0 top
C128 "10nf" C0402(1005)#1 62.898,39.559 r0 top value=10nF
C129 "0.1uF" C0402(1005)#1 62.897,38.459 r0 top
C130 "10uF" C0402(1005)#1 59.717,53.157 r0 top
C131 "0.1uF" C0402(1005)#1 59.717,52.06 r0 top
C132 "10uF" C0402(1005)#1 56.025,53.165 r0 top
C133 "0.1uF" C0402(1005)#1 56.025,52.065 r180 top
C134 "0.1uF" C0402(1005)#1 53.85,52.065 r0 top
C135 "0.1uF" C0402(1005)#1 53.37,39.556 r180 top
C136 "5.6nF" C0402(1005)#1 53.419,54.715 r90 top
C137 "150pF" C0402(1005)#1 53.85,53.165 r180 top
C138 "0.1uF" C0402(1005)#1 51.944,50.498 r270 top
C139 "10nf" C0402(1005)#1 50.844,50.498 r270 top value=10nF
C140 "10uF" C0402(1005)#1 52.855,42.13 r90 bottom
C141 "0.1uF" C0402(1005)#1 53.955,42.13 r90 bottom
C142 "10nf" C0402(1005)#1 51.947,41.578 r90 top value=10nF
C143 "0.1uF" C0402(1005)#1 50.831,41.578 r90 top
C144 "18pF" C0402(1005)#1 48.714,50.241 r270 top
C145 "18pF" C0402(1005)#1 48.714,48.19 r90 top
C146 "10uF" C0402(1005)#1 47.64,54.914 r90 top
C147 "0.1uF" C0402(1005)#1 48.768,54.907 r270 top
C148 "0.1uF" C0402(1005)#1 50.994,54.163 r180 top
C149 "10uF" C0402(1005)#1 50.987,53.063 r0 top
C150 "0.1uF" C0402(1005)#1 42.843,47.078 r270 top
C151 "10uF" C0402(1005)#1 41.176,47.082 r270 top
C152 "RSVD" C0402(1005)#1 9.668,65.929 r270 top
C153 "47pF" C0402(1005)#1 13.115,63.361 r180 top
C154 "33n" WIMA_2,5x6,5x7,2#1 16.646,65.006 r270 bottom
C155 "1.5nF" C0402(1005)#1 16.646,64.026 r90 top
C156 "100n" WIMA_2,5x6,5x7,2#2 19.281,65.006 r270 bottom
C157 "47pF" C0402(1005)#1 22.961,63.361 r180 top
C158 "RSVD" C0402(1005)#1 9.668,73.092 r90 top
C159 "47pF" C0402(1005)#1 14.103,74.214 r180 top
C160 "33n" WIMA_2,5x6,5x7,2#2 16.646,72.573 r90 bottom
C161 "1.5nF" C0402(1005)#1 16.646,73.555 r270 top
C162 "100n" WIMA_2,5x6,5x7,2#2 19.281,72.573 r90 bottom
C163 "47pF" C0402(1005)#1 24.249,74.214 r180 top
C164 "0.1uF" C0402(1005)#1 26.111,65.587 r270 top
C165 "0.1uF" C0402(1005)#1 16.351,65.938 r270 top
C166 "0.1uF" C0402(1005)#1 18.942,71.469 r0 top
C167 "0.1uF" C0402(1005)#1 9.668,70.662 r90 top
C168 "0.1uF" C0603(1608) 88.17,84.562 r180 top
C169 "330nF" WIMA_2,5x6,5x7,2#2 60.844,95.145 r180 top
C170 "0.1uF" C0402(1005)#1 28.244,94.771 r90 top
C171 "0.1uF" C0402(1005)#1 16.965,81.313 r180 top
C172 "0.1uF" C0402(1005)#1 35.27,89.48 r90 top
C173 "0.1uF" C0402(1005)#1 25.075,86.571 r180 top
C174 "100pF" C0402(1005)#1 67.833,96.336 r270 top
C175 "100pF" C0402(1005)#1 69.949,96.336 r270 top
C176 "330nF" WIMA_2,5x6,5x7,2#2 53.258,95.111 r180 top
C177 "47pF" C0603(1608) 27.151,83.865 r90 top
C178 "47pF" C0603(1608) 30.651,85.436 r0 top
C179 "1uF" WIMA5 22.534,90.542 r180 top
C180 "47pF" C0603(1608) 13.2,84.709 r90 top
C181 "1uF" WIMA5 22.534,96.492 r180 top
C182 "1uF" WIMA5 14.964,90.542 r0 top
C183 "1uF" WIMA5 14.964,96.492 r0 top
C184 "330nF" WIMA_2,5x6,5x7,2#2 53.258,97.981 r180 top
C185 "47pF" C0603(1608) 31.786,98.587 r0 top
C186 "330nF" WIMA_2,5x6,5x7,2#2 60.844,98.015 r180 top
C187 "100pF" C0402(1005)#1 78.45,96.309 r270 top
C188 "100pF" C0402(1005)#1 76.281,96.309 r270 top
C189 "47uF" "CAP 6.3x6"#2 8,43.083 r90 top
C190 "47uF" "CAP 6.3x6"#2 21.852,32.134 r270 top
C191 "47uF" "CAP 6.3x6"#2 8,21.632 r90 top
C192 "0.1uF" C0603(1608) 13.793,17.955 r0 top
C193 "0.1uF" C0603(1608) 14.855,51.275 r180 top
DA1A "OPA1612AIDR" SOIC8 85.105,8.243 r180 top (schematic designator DA1)
DA1B "OPA1612AIDR" SOIC8 62.917,8.247 r180 top (schematic designator DA1)
DA1C "OPA1612AIDR" SOIC8 40.73,8.247 r180 top (schematic designator DA1)
DA2 "PLR135-T9" PLR135-T9 90,94.5 r0 top locked
DA3 "OPA1612AIDR" SOIC8 52.668,81.678 r270 top
DA4 "OPA1612AIDR" SOIC8 52.676,68.618 r270 top
DA5 "OPA1612AIDR" SOIC8 36.904,75.727 r270 top
DA6 "OPA1612AIDR" SOIC8 13.032,68.786 r270 top
DA7 "OPA1612AIDR" SOIC8 22.757,68.786 r270 top
DA8 "LMK1C1104PWR" TSSOP-8 56.431,43.657 r0 bottom
DA9 "TLV431BSN1T1G" SOT-23 75.647,43.712 r270 top
DA10 "OPA1612AIDR" SOIC8 20.175,84.673 r180 top
DA11 "OPA1612AIDR" SOIC8 31.869,92.011 r90 top
DD1A "AK4493SEQ" LQFP48 85.106,20.769 r270 top (schematic designator DD1)
DD1B "AK4493SEQ" LQFP48 62.918,20.769 r270 top (schematic designator DD1)
DD1C "AK4493SEQ" LQFP48 40.73,20.769 r270 top (schematic designator DD1)
DD2 "SI8660BA-B-IS1" SOIC-16#1 82.923,50.419 r90 top
DD3 "SI8660BA-B-IS1" SOIC-16#2 82.923,36.577 r270 top
DD4 "ISO1540DR" SOIC8 84.195,60.337 r180 top
DD5 "AK5572EN" QFN50P700X700X60-49N 70.398,70.701 r0 top
DD6 "ADAU1452KCPZ" QFN50P1000X1000X100-73N-D 58.179,45.784 r270 top
DD7 "25LC1024-I/SM" SOIC8 44.738,42.203 r90 top
E1 "MS" Shields_17x21 17.326,68.798 r180 top
FB1 "BLM18KG102" BLM18-Series 15.234,23.477 r0 top
FB2 "BLM18KG102" BLM18-Series 14.584,20.799 r270 top
FB3 "BLM18KG102" BLM18-Series 2.145,16.343 r270 top
FB4 "BLM18KG102" BLM18-Series 50.767,55.357 r0 top
FB5 "BLM18KG102" BLM18-Series 14.104,49.115 r90 top
K1 "FTR-B4GA4.5Z-B05" FTR-B4G 34.774,62.874 r180 top
L1 "LQH43CN470K03" LQH43C 95.837,86.028 r270 top
L2 "TMPA0603S-6R8MN-D" PHC0518-Series 33.488,43.549 r0 top
R1A "10" R0603 95.182,10.608 r270 top (schematic designator R1)
R1B "10" R0603 72.994,10.608 r270 top (schematic designator R1)
R1C "10" R0603 50.806,10.608 r270 top (schematic designator R1)
R2A "10" R0603 93.673,10.608 r270 top (schematic designator R2)
R2B "10" R0603 71.485,10.608 r270 top (schematic designator R2)
R2C "10" R0603 49.297,10.608 r270 top (schematic designator R2)
R3A "300" R0402 88.701,14.969 r0 top (schematic designator R3)
R3B "300" R0402 66.513,14.969 r0 top (schematic designator R3)
R3C "300" R0402 44.325,14.969 r0 top (schematic designator R3)
R4A "27" R0402 90.201,12.414 r270 top (schematic designator R4)
R4B "27" R0402 68.013,12.414 r270 top (schematic designator R4)
R4C "27" R0402 45.826,12.414 r270 top (schematic designator R4)
R5A "300" R0402 88.701,12.814 r0 top (schematic designator R5)
R5B "300" R0402 66.513,12.814 r0 top (schematic designator R5)
R5C "300" R0402 44.325,12.814 r0 top (schematic designator R5)
R6A "910" R0402 90.778,10.496 r270 top (schematic designator R6)
R6B "910" R0402 68.59,10.496 r270 top (schematic designator R6)
R6C "910" R0402 46.402,10.5 r270 top (schematic designator R6)
R7A "91" R0402 90.323,7.946 r0 top (schematic designator R7)
R7B "91" R0402 68.135,7.946 r0 top (schematic designator R7)
R7C "91" R0402 45.947,7.95 r0 top (schematic designator R7)
R8A "1 k" R0402 70.551,41.155 r90 top (schematic designator R8)
R8B "1 k" R0402 69.534,41.155 r90 top (schematic designator R8)
R8C "1 k" R0402 68.521,41.155 r90 top (schematic designator R8)
R9A "910" R0402 90.768,6.446 r270 top (schematic designator R9)
R9B "910" R0402 68.58,6.446 r270 top (schematic designator R9)
R9C "910" R0402 46.392,6.45 r270 top (schematic designator R9)
R10A "910" R0402 79.43,8.085 r270 top (schematic designator R10)
R10B "910" R0402 57.242,8.085 r270 top (schematic designator R10)
R10C "910" R0402 35.055,8.085 r270 top (schematic designator R10)
R11A "910" R0402 79.43,12.135 r270 top (schematic designator R11)
R11B "910" R0402 57.242,12.135 r270 top (schematic designator R11)
R11C "910" R0402 35.055,12.135 r270 top (schematic designator R11)
R12A "91" R0402 79.875,9.585 r0 top (schematic designator R12)
R12B "91" R0402 57.687,9.585 r0 top (schematic designator R12)
R12C "91" R0402 35.5,9.585 r0 top (schematic designator R12)
R13A "300" R0402 81.526,14.969 r180 top (schematic designator R13)
R13B "300" R0402 59.294,14.969 r180 top (schematic designator R13)
R13C "300" R0402 37.15,14.969 r180 top (schematic designator R13)
R14A "27" R0402 80.452,12.135 r270 top (schematic designator R14)
R14B "27" R0402 58.264,12.135 r270 top (schematic designator R14)
R14C "27" R0402 36.076,12.135 r270 top (schematic designator R14)
R15A "300" R0402 81.951,12.814 r180 top (schematic designator R15)
R15B "300" R0402 59.763,12.814 r180 top (schematic designator R15)
R15C "300" R0402 37.576,12.814 r180 top (schematic designator R15)
R16A "4.7 k" R0402 79.356,22.16 r90 top (schematic designator R16)
R16B "4.7 k" R0402 57.131,22.16 r90 top (schematic designator R16)
R16C "4.7 k" R0402 34.943,22.16 r90 top (schematic designator R16)
R17A "10" R0603 75.142,10.608 r270 top (schematic designator R17)
R17B "10" R0603 52.858,10.608 r270 top (schematic designator R17)
R17C "10" R0603 30.735,10.608 r270 top (schematic designator R17)
R18A "10" R0603 76.651,10.608 r270 top (schematic designator R18)
R18B "10" R0603 54.367,10.608 r270 top (schematic designator R18)
R18C "10" R0603 32.244,10.608 r270 top (schematic designator R18)
R19 "75" R0603 87.442,87.112 r270 top value="10 k"
R20 "100" R0402 38.512,53.59 r180 top
R21 "100 k" R0402 38.512,54.612 r180 top
R22 "51" R0402 75.975,47.238 r0 top
R23 "51" R0402 75.975,48.517 r0 top
R24 "51" R0402 75.975,49.788 r0 top
R25 "1 k" R0402 74.724,58 r270 top
R26 "51" R0402 89.446,36.367 r90 top
R27 "51" R0402 89.871,34.684 r0 top
R28 "51" R0402 89.871,33.43 r0 top
R29 "4.7 k" R0402 88.645,58.973 r90 top
R30 "100" R0402 66.979,41.576 r0 top
R31 "4.7 k" R0402 88.645,60.873 r270 top
R32 "680 k" R0603 25.538,15.602 r0 top
R33 "680 k" R0603 25.538,23.458 r0 top
R34 "47 k" R0603 22.205,15.602 r0 top
R35 "51 k" R0603 22.205,23.458 r0 top
R36 "1 k" R0603 18.334,10.102 r0 top
R37 "49.9 k" R0603 25.538,10.102 r180 top
R38 "1 k" R0603 18.334,17.958 r0 top
R39 "33 k" R0603 25.538,17.958 r180 top
R40 "1 M" R0603 25.54,7.845 r180 top
R41 "680 k" R0603 25.54,56.867 r0 top
R42 "30 k" R0603 22.207,7.845 r180 top
R43 "47 k" R0603 22.207,56.867 r0 top
R44 "1 k" R0603 18.336,2.345 r0 top
R45 "110 k" R0603 25.54,2.345 r180 top
R46 "1 k" R0603 18.336,51.275 r0 top
R47 "49.9 k" R0603 25.54,51.275 r180 top
R48 "30k" R0603 4.687,9.987 r180 top value="120 k"
R49 "110 k" R0603 11.891,9.987 r0 top
R50 "30 k" R0603 8.558,15.59 r0 top
R51 "1 M" R0603 11.891,15.59 r0 top
R52 "200 k" R0402 27.336,35.533 r180 top
R53 "100 k" R0402 31.247,35.866 r0 top
R54 "22 k" R0402 29.78,35.412 r270 top
R55 "33 k" R0402 52.462,87.153 r180 top
R56 "4.7 k" R0402 38.214,80.079 r180 top
R57 "10" R0603 5.709,50.459 r180 top
R58 "4.7 k" R0402 33.646,75.602 r270 top
R59 "10 k" R0402 48.188,60.769 r90 top
R60 "10 k" R0402 50.566,87.149 r180 top
R61 "10 k" R0402 46.815,61.215 r0 top
R62 "10" R0402 53.966,86.705 r270 top
R63 "510" R0402 44.969,61.208 r180 top
R64 "10" R0603 9.428,50.459 r180 top
R65 "33 k" R0402 52.466,76.177 r180 top
R66 "10 k" R0402 50.566,76.178 r180 top
R67 "10 k" R0402 70.226,75.606 r0 top
R68 "10" R0402 53.966,76.633 r90 top
R69 "100 k" R0402 35.281,69.372 r180 top
R70 "33 k" R0402 52.469,74.093 r180 top
R71 "10 k" R0402 50.573,74.089 r180 top
R72 "10 k" R0402 75.768,70.338 r180 top
R73 "10" R0402 53.973,73.645 r270 top
R74 "51" R0402 75.768,69.38 r180 top
R75 "51" R0402 75.768,68.434 r180 top
R76 "51" R0402 75.316,66.984 r90 top
R77 "4.7 k" R0402 37.142,71.081 r180 top
R78 "33 k" R0402 52.473,63.117 r180 top
R79 "4.7 k" R0402 37.588,69.709 r270 top
R80 "10 k" R0402 50.573,63.118 r180 top
R81 "100 k" R0402 39.396,64.464 r180 top
R82 "10" R0402 53.973,63.573 r90 top
R83 "1 k" R0402 77.545,60.819 r270 top
R84 "1 k" R0402 59.717,54.265 r0 top
R85 "51" R0402 65.847,37.785 r180 top
R86 "51" R0402 64.747,36.889 r180 top
R87 "51" R0402 63.75,35.984 r180 top
R88 "51" R0402 60.388,36.001 r90 top
R89 "51" R0402 59.491,36.001 r90 top
R90 "51" R0402 58.595,36.001 r90 top
R91 "51" R0402 57.347,36.001 r90 top
R92 "51" R0402 56.451,36.001 r90 top
R93 "51" R0402 55.555,36.001 r90 top
R94 "51" R0402 54.331,36.001 r90 top
R95 "51" R0402 53.315,36.001 r90 top
R96 "51" R0402 52.27,36.001 r90 top
R97 "4.3 k" R0402 54.469,54.715 r90 top
R98 "22" R0402 57.201,48.099 r180 bottom
R99 "10 k" R0402 53.941,44.08 r270 bottom
R100 "22" R0402 55.019,38.823 r90 bottom
R101 "22" R0402 57.877,39.248 r180 bottom
R102 "22" R0402 56.148,38.823 r90 bottom
R103 "100" R0402 50.215,48.47 r180 top
R104 "22" R0402 55.066,48.099 r180 bottom
R105 "4.7 k" R0402 80.969,64.2 r180 top
R106 "4.7 k" R0402 79.235,64.689 r270 top
R107 "100" R0402 51.148,47.158 r180 top
R108 "10 k" R0402 42.964,37.822 r180 top
R109 "10 k" R0402 41.176,45.132 r90 top
R110 "10 k" R0402 44.864,37.822 r180 top
R111 "22 k" R0402 15.193,63.614 r0 top
R112 "3.3 k" R0402 13.115,64.411 r0 top
R113 "3.3 k" R0402 17.76,63.192 r90 top
R114 "100 k" R0402 18.664,63.724 r90 top
R115 "47 k" R0402 8.618,65.929 r270 top
R116 "3.3 k" R0402 22.958,64.411 r0 top
R117 "150" R0402 11.26,64.411 r0 top
R118 "150" R0402 21.459,63.765 r90 top
R119 "22 k" R0402 15.608,73.555 r90 top
R120 "3.3 k" R0402 18.649,73.894 r270 top
R121 "100 k" R0402 17.745,74.426 r270 top
R122 "3.3 k" R0402 14.103,73.161 r0 top
R123 "47 k" R0402 8.618,73.092 r90 top
R124 "3.3 k" R0402 24.249,73.161 r0 top
R125 "150" R0402 22.299,74.214 r0 top
R126 "150" R0402 12.153,74.214 r0 top
R127 "100" R0402 75.877,41.235 r180 top
R128 "100 k" R0402 77.786,42.895 r90 top
R129 "100 k" R0402 75.178,56.625 r0 top
R130 "47 k" R0402 28.786,35.412 r90 top
R131 "10" R0402 66.156,78.168 r180 top
R132 "10" R0402 66.156,77.193 r180 top
R133 "10" R0402 63.616,72.145 r180 top
R134 "10" R0402 63.615,71.277 r180 top
R135 "22 k" R0603 36.745,90.734 r90 top
R136 "100" R0603 66.358,95.984 r270 top
R137 "22 k" R0603 38.545,92.362 r270 top
R138 "560 k" R0603 67.13,93.433 r0 top
R139 "560 k" R0603 70.648,93.433 r0 top
R140 "100" R0603 71.424,95.984 r270 top
R141 "22 k" R0603 33.951,87.236 r0 top
R142 "22 k" R0603 30.651,87.236 r0 top
R143 "22 k" R0603 25.15,83.865 r270 top
R144 "47 k" R0603 28.055,89.925 r270 top
R145 "22 k" R0603 6.811,80.264 r0 top
R146 "100 k" R0603 6.811,82.465 r180 top
R147 "100 k" R0402 25.025,81.313 r180 top
R148 "22 k" R0603 10.034,86.115 r90 top
R149 "22 k" R0603 15.2,84.633 r270 top
R150 "22 k" R0603 10.034,93.874 r270 top
R151 "22 k" R0603 10.034,81.699 r90 top
R152 "22 k" R0603 10.034,90.05 r270 top
R153 "100 k" R0603 6.811,86.865 r180 top
R154 "100 k" R0402 19.905,81.313 r180 top
R155 "22 k" R0603 6.811,84.665 r0 top
R156 "47 k" R0603 28.467,96.786 r0 top
R164 "22 k" R0603 31.767,96.786 r0 top
R166 "22 k" R0603 37.395,95.663 r270 top
R168 "22 k" R0603 34.341,97.612 r90 top
R169 "22 k" R0603 35.595,94.034 r90 top
R171 "100" R0603 79.933,95.984 r270 top
R172 "560 k" R0603 79.18,93.433 r0 top
R173 "560 k" R0603 75.608,93.433 r0 top
R174 "100" R0603 74.806,95.984 r270 top
U1 "LT3042" MSOP-10-EP 21.924,13.052 r0 top
U2 "LT3042" MSOP-10-EP 21.924,20.908 r0 top
U3 "LT3042" MSOP-10-EP 21.926,5.295 r0 top
U4 "LT3042" MSOP-10-EP 21.926,54.318 r0 top
U5 "LT3094" DFN-12 8.277,12.839 r0 top
U6 "TPS54302DDCR" SOT23-6 30.73,38.449 r180 top
VD1 "1N4148" SOD-323 32.693,54.587 r90 top
VD2 "BAR43SFILM" SOT-23 58.637,67.908 r0 top
VD3 "BAR43SFILM" SOT-23 58.637,71.492 r180 top
VD4 "BAR43SFILM" SOT-23 58.637,75.132 r0 top
VD5 "BAR43SFILM" SOT-23 58.637,78.772 r180 top
VT1 "IRLML6244" SOT-23 35.587,54.535 r0 top
VT2 "DTC143ZET1G" SOT-416 77.17,57.329 r0 top
VT3 "FZT751TA" SOT-223 61.962,59.538 r0 top
VT4 "IRLML6402TRPBF" SOT-23 73.157,41.167 r180 top
VT5 "DTC143ZET1G" SOT-416 75.469,55.088 r90 top
X1 "PJ-327" PJ-327A 13.276,83.254 r270 bottom
X3 "" KLS1-TSJ3.5-009 5,95 r0 top locked
X9 "HDMI-302-1-N-30" MINI-HDMI 96.167,42.363 r270 top locked
XP1 "A2501WR-03P" A2501WR-03P 15.363,40.835 r270 bottom
XP2 "PLS-4" 4x-2.54 90.441,65.14 r0 top
XP3 "PLS-3" 3x-2.54 66.347,91.128 r0 top
XP4 "MUP-R4151-01" U.FL-R-SMT(10)_REC 2.561,72.206 r90 top
XP5 "MUP-R4151-01" U.FL-R-SMT(10)_REC 36.527,2.772 r180 top
XP6 "MUP-R4151-01" U.FL-R-SMT(10)_REC 2.561,65.251 r90 top
XP7 "MUP-R4151-01" U.FL-R-SMT(10)_REC 44.531,2.772 r180 top
XP8 "MUP-R4151-01" U.FL-R-SMT(10)_REC 58.715,2.772 r180 top
XP9 "MUP-R4151-01" U.FL-R-SMT(10)_REC 2.561,80.246 r90 top
XP10 "MUP-R4151-01" U.FL-R-SMT(10)_REC 66.719,2.772 r180 top
XP11 "MUP-R4151-01" U.FL-R-SMT(10)_REC 80.903,2.772 r180 top
XP12 "MUP-R4151-01" U.FL-R-SMT(10)_REC 88.907,2.772 r180 top
XP13 "MUP-R4151-01" U.FL-R-SMT(10)_REC 2.561,85.159 r90 top
XP14 "PLS-3" 3x-2.54 74.854,91.128 r0 top
ZQ1 "ABM8G-24.576MHZ-18-D2Y-T" ABM8 46.339,49.727 r0 top

## Footprints (in the part's own frame and the unit in brackets; to place one, negate y for a bottom-side part, rotate by r counter-clockwise, add the part's x,y. Pads: shape width x height; smd on the part's side, far side on the other; paste and mask are expansions set on the pad)
3x-2.54 [mm]
  rect 1.55x1.55 hole 1.05: 1(0,0)
  round 1.55 hole 1.05: 2(2.54,0) 3(5.08,0)
  silkscreen extent -1.52,-1.27 6.58,1.21
4x-2.54 [mm] "Board-to-Board Connector, PC104 CD ISA, Vertical, 2-Row, 40-Postion, Pitch 2.54mm, Receptacle"
  rect 1.55x1.55 hole 1.05: 1(0,0)
  round 1.55 hole 1.05: 2(2.54,0) 3(5.08,0) 4(7.62,0)
  silkscreen extent -1.53,-1.27 8.89,1.21
A2501WR-03P [mm]
  rect 1.55x1.55 hole 1.05: 1(-2.5,0)
  round 1.55 hole 1.05: 2(0,0) 3(2.5,0)
  silkscreen extent -5,-2.5 5,8.48, body extent -5.12,-2.28 5.13,9.47, height 6
ABM8 [mm] "SMD, 4-Leads, Body 2.6x3.3mm"
  rrect50% 1.2x1.4 smd: 1(-0.85,1.1) 2(-0.85,-1.1) 3(0.85,-1.1) 4(0.85,1.1)
  silkscreen extent -1.87,-0.18 1.35,2.22, body extent -1.29,-1.65 1.19,1.55, height 0.85
BLM18-Series [mm]
  rrect15% 0.87x0.98 smd mask+0.05: 1(-0.665,0) 2(0.665,0)
  body extent -0.87,-0.47 0.88,0.48, height 0.95
C0402(1005)#1 [mm]
  rrect15% 0.62x0.62 smd mask+0.05: 1(-0.44,0) 2(0.44,0)
  body extent -0.52,-0.27 0.53,0.28, height 0.55
C0402(1005)#2 [mm]
  rrect15% 0.62x0.62 smd mask+0.05: 1(-0.443,0) 2(0.44,0)
  body extent -0.52,-0.27 0.53,0.28, height 0.55
C0603(1608) [mm]
  rrect15% 1x0.95 smd mask+0.05: 1(-0.75,0) 2(0.75,0)
  Top Layer pour cut-out: -0.05,0.45 0.05,0.45 0.05,-0.45 -0.05,-0.45
  silkscreen extent -1.5,-0.75 1.5,0.75, body extent -0.9,-0.5 0.9,0.5, height 0.9
C0805(2012)#1 [mm]
  rrect15% 1.15x1.45 smd mask+0.05: 1(-0.85,0) 2(0.85,0)
  Top Layer pour cut-out: -0.05,0.651 0.05,0.651 0.05,-0.649 -0.05,-0.649
  silkscreen extent -1.7,-1 1.7,1, body extent -1.1,-0.72 1.1,0.73, height 0.75
C0805(2012)#2 [mm]
  rrect15% 1.15x1.45 smd mask+0.05: 1(-0.85,0) 2(0.85,0)
  silkscreen extent -1.7,-1 1.7,1, body extent -1.1,-0.72 1.1,0.73, height 0.75
C1206(3216) [mm]
  rrect15% 1.1x1.8 smd mask+0.05: 1(-1.375,0) 2(1.375,0)
  silkscreen extent -0.3,-0.8 0.3,0.8, body extent -1.6,-0.8 1.6,0.8, height 1
"CAP 6.3x6"#1 [mm]
  rrect50% 1.6x3.4 smd: 1(0,-2.8)
  rrect50% 1.6x3.3 smd: 2(0,2.8)
  silkscreen extent -3.3,-5.2 3.3,3.3, body extent -3.3,-3.65 3.3,3.65, height 5.98
"CAP 6.3x6"#2 [mm]
  rrect50% 1.6x3.3 smd: 1(0,-2.8) 2(0,2.8)
  silkscreen extent -3.3,-5.2 3.3,3.3, body extent -3.3,-3.65 3.3,3.65, height 5.98
CASE_A(3216) [mm]
  rrect15% 1.7x1.25 smd: 1(-1.275,0) 2(1.275,0)
  silkscreen extent -2.15,-1 1.7,1, body extent -1.7,-0.9 1.7,0.9, height 1.7
CASE_C(6032) [mm]
  rrect15% 2.45x2.3 smd: 1(-2.375,0) 2(2.375,0)
  silkscreen extent -3.87,-1.7 3.1,1.82, body extent -3,-1.6 3,1.6, height 2.5
DFN-12 [mm] "12-Leads, Body 3x3mm, Pitch 0.45mm, Thermal Pad 2.38x1.65mm"
  rrect50% 0.7x0.25 smd: 1(-1.375,1.225) 2(-1.375,0.725) 3(-1.375,0.225) 4(-1.375,-0.275) 5(-1.375,-0.775) 6(-1.375,-1.275) 7(1.425,-1.275) 8(1.425,-0.775) 9(1.425,-0.275) 10(1.425,0.225) 11(1.425,0.725) 12(1.425,1.225)
  rect 1.65x2.38 smd: 13(0.025,-0.025)
  silkscreen extent -1.32,1.58 -1.23,1.67, body extent -1.47,-1.53 1.53,1.47, height 0.8
FTR-B4G [mm]
  rrect15% 1.75x0.8 smd mask+0.05: 1(-2.2,3.81) 2(-2.2,0.61) 3(-2.2,-1.59) 4(-2.2,-3.79) 5(2.22,-3.79) 6(2.22,-1.59) 7(2.22,0.61) 8(2.22,3.81)
  silkscreen extent -2.85,-5.33 2.85,5.33, body extent -2.85,-5.3 2.85,5.3, height 9.71
KLS1-TSJ3.5-009 [mm]
  round 1.8 hole 1.8 unplated paste-2539.97 mask+0.1: 0(0,-3.6) 0(0,2.4)
  oval 1.6x2.4 hole 1 slot 1.6 at 90 deg: 1(-2.9,3) 2(-2.9,-3.7)
  oval 1.6x2 / inner oval 1.6x2.4 / far side oval 1.6x2.4 hole 1 slot 1.6 at 90 deg: 1(2.9,3)
  oval 1.6x2.4 hole 1 slot 1.6 at 90 deg copper offset -0.1,0: 2(2.9,-3.7) 3(2.9,-0.4)
  silkscreen extent -3.4,-6.8 3.6,1.7, body extent -3.2,-6.6 3.39,7.4, height 5.52
LQFP48 [mm] "LQFP, 48-Leads, Body 7.00x7.00mm, Pitch 0.50mm, IPC Medium Density"
  oval 1.2x0.3 smd: 1(-4.25,2.75) 2(-4.25,2.25) 3(-4.25,1.75) 4(-4.25,1.25) 5(-4.25,0.75) 6(-4.25,0.25) 7(-4.25,-0.25) 8(-4.25,-0.75) 9(-4.25,-1.25) 10(-4.25,-1.75) 11(-4.25,-2.25) 12(-4.25,-2.75) 25(4.25,-2.75) 26(4.25,-2.25) 27(4.25,-1.75) 28(4.25,-1.25) 29(4.25,-0.75) 30(4.25,-0.25) 31(4.25,0.25) 32(4.25,0.75) 33(4.25,1.25) 34(4.25,1.75) 35(4.25,2.25) 36(4.25,2.75)
  oval 0.3x1.2 smd: 13(-2.75,-4.25) 14(-2.25,-4.25) 15(-1.75,-4.25) 16(-1.25,-4.25) 17(-0.75,-4.25) 18(-0.25,-4.25) 19(0.25,-4.25) 20(0.75,-4.25) 21(1.25,-4.25) 22(1.75,-4.25) 23(2.25,-4.25) 24(2.75,-4.25) 37(2.75,4.25) 38(2.25,4.25) 39(1.75,4.25) 40(1.25,4.25) 41(0.75,4.25) 42(0.25,4.25) 43(-0.25,4.25) 44(-0.75,4.25) 45(-1.25,4.25) 46(-1.75,4.25) 47(-2.25,4.25) 48(-2.75,4.25)
  silkscreen extent -4.2,-3.85 3.85,4.15, body extent -4.51,-4.51 4.51,4.51, height 1.55
LQH43C [mm]
  rect 2x3.5 smd: 1(0,-0.025) 2(4.05,-0.025)
  silkscreen extent -1.85,-2.18 4.94,2.13, body extent -0.32,-1.62 4.38,1.58, height 2.6
MINI-HDMI [mm]
  rrect50% 0.2x1.3 smd paste-2539.97: 1(-3.6,-3.65) 2(-3.2,-3.65) 3(-2.8,-3.65) 4(-2.4,-3.65) 5(-2,-3.65) 6(-1.6,-3.65) 7(-1.2,-3.65) 8(-0.8,-3.65) 9(-0.4,-3.65) 10(0,-3.65) 11(0.4,-3.65) 12(0.8,-3.65) 13(1.2,-3.65) 14(1.6,-3.65) 15(2,-3.65) 16(2.4,-3.65) 17(2.8,-3.65) 18(3.2,-3.65) 19(3.6,-3.65)
  oval 0.8x1.6 hole 0.4 slot 1.2 at 90 deg: 20(-5.425,-2.553) 20(5.425,-2.553)
  oval 0.8x1.4 hole 0.4 slot 1 at 90 deg: 20(-5.425,1.947) 20(5.425,1.947)
  silkscreen extent -5.63,-3.44 5.64,0.72, body extent -5.62,-3.95 5.63,3.95, height 3.3
MSOP-10-EP [mm]
  oval 1x0.3 smd: 1(-2.25,1) 2(-2.25,0.5) 3(-2.25,0) 4(-2.25,-0.5) 5(-2.25,-1) 6(2.25,-1) 7(2.25,-0.5) 8(2.25,0) 9(2.25,0.5) 10(2.25,1)
  rect 1.7x1.9 smd: 11(0,0)
  silkscreen extent -2.35,-1.45 1.33,1.52, body extent -2.45,-1.5 2.45,1.5, height 1.02
PHC0518-Series [mm]
  rrect15% 1.9x2.5 smd mask+0.05: 1(-2.05,0) 2(2.05,0)
  body extent -2.9,-2.7 2.9,2.7, height 1.8
PJ-327A [mm]
  rrect50% 3.2x2 smd: 1(4,9.525) 2(-4,8.575) 3(4,5.975) 4(-4,1.65) 5(4,0.15)
  silkscreen extent -3.6,-0.87 3.6,11.37, body extent -4.8,-0.85 4.6,13.15, height 5
PLR135-T9 [mm]
  rect 1.5x1.5 hole 0.8: 1(-2.54,-2.794)
  round 1.5 hole 0.8: 2(0,-2.794) 3(2.54,-2.794)
  round 3.2 hole 3.2 unplated: MH(-3.81,1.016) MH(3.81,1.016)
  silkscreen extent -5.84,-5.59 5.8,4.92, body extent -5.73,-5.63 5.77,15.19, height 19.54
QFN50P700X700X60-49N [mm]
  rect 0.7x0.27 smd mask+0.05: 1(-3.435,2.75) 12(-3.435,-2.75) 25(3.515,-2.75) 36(3.515,2.75)
  rect 0.86x0.27 smd mask+0.05: 2(-3.435,2.25) 3(-3.435,1.75) 4(-3.435,1.25) 5(-3.435,0.75) 6(-3.435,0.25) 7(-3.435,-0.25) 8(-3.435,-0.75) 9(-3.435,-1.25) 10(-3.435,-1.75) 11(-3.435,-2.25) 26(3.435,-2.25) 27(3.435,-1.75) 28(3.435,-1.25) 29(3.435,-0.75) 30(3.435,-0.25) 31(3.435,0.25) 32(3.435,0.75) 33(3.435,1.25) 34(3.435,1.75) 35(3.435,2.25)
  rect 0.27x0.7 smd mask+0.05: 13(-2.75,-3.482) 24(2.75,-3.482) 37(2.75,3.435)
  rect 0.27x0.86 smd mask+0.05: 14(-2.25,-3.435) 15(-1.75,-3.435) 16(-1.25,-3.435) 17(-0.75,-3.435) 18(-0.25,-3.435) 19(0.25,-3.435) 20(0.75,-3.435) 21(1.25,-3.435) 22(1.75,-3.435) 23(2.25,-3.435) 38(2.25,3.435) 39(1.75,3.435) 40(1.25,3.435) 41(0.75,3.435) 42(0.25,3.435) 43(-0.25,3.435) 44(-0.75,3.435) 45(-1.25,3.435) 46(-1.75,3.435) 47(-2.25,3.435) 48(-2.75,3.435)
  rect 5.4x5.4 smd paste-4 mask+0.05: 49(0,0)
  silkscreen extent -3.96,-3.5 3.5,3.96, body extent -3.5,-3.5 3.5,3.5, height 0.65
QFN50P1000X1000X100-73N-D [mm]
  rrect50% 0.85x0.3 smd: 1(-4.95,4.25) 2(-4.95,3.75) 3(-4.95,3.25) 4(-4.95,2.75) 5(-4.95,2.25) 6(-4.95,1.75) 7(-4.95,1.25) 8(-4.95,0.75) 9(-4.95,0.25) 10(-4.95,-0.25) 11(-4.95,-0.75) 12(-4.95,-1.25) 13(-4.95,-1.75) 14(-4.95,-2.25) 15(-4.95,-2.75) 16(-4.95,-3.25) 17(-4.95,-3.75) 18(-4.95,-4.25) 37(4.95,-4.25) 38(4.95,-3.75) 39(4.95,-3.25) 40(4.95,-2.75) 41(4.95,-2.25) 42(4.95,-1.75) 43(4.95,-1.25) 44(4.95,-0.75) 45(4.95,-0.25) 46(4.95,0.25) 47(4.95,0.75) 48(4.95,1.25) 49(4.95,1.75) 50(4.95,2.25) 51(4.95,2.75) 52(4.95,3.25) 53(4.95,3.75) 54(4.95,4.25)
  rrect50% 0.3x0.85 smd: 19(-4.25,-4.95) 20(-3.75,-4.95) 21(-3.25,-4.95) 22(-2.75,-4.95) 23(-2.25,-4.95) 24(-1.75,-4.95) 25(-1.25,-4.95) 26(-0.75,-4.95) 27(-0.25,-4.95) 28(0.25,-4.95) 29(0.75,-4.95) 30(1.25,-4.95) 31(1.75,-4.95) 32(2.25,-4.95) 33(2.75,-4.95) 34(3.25,-4.95) 35(3.75,-4.95) 36(4.25,-4.95) 55(4.25,4.95) 56(3.75,4.95) 57(3.25,4.95) 58(2.75,4.95) 59(2.25,4.95) 60(1.75,4.95) 61(1.25,4.95) 62(0.75,4.95) 63(0.25,4.95) 64(-0.25,4.95) 65(-0.75,4.95) 66(-1.25,4.95) 67(-1.75,4.95) 68(-2.25,4.95) 69(-2.75,4.95) 70(-3.25,4.95) 71(-3.75,4.95) 72(-4.25,4.95)
  rect 5.45x5.45 smd: 73(0,0)
  silkscreen extent -5.5,4.88 -5.25,5.13, body extent -5.05,-5.05 5.05,5.05, height 1
R0402 [mm]
  rrect15% 0.6x0.55 smd mask+0.05: 1(-0.425,0) 2(0.425,0)
  body extent -0.5,-0.25 0.5,0.25, height 0.35
R0603 [mm]
  rrect15% 0.85x1 smd mask+0.05: 1(-0.775,0) 2(0.775,0)
  silkscreen extent -1.5,-0.75 1.5,0.75, body extent -0.85,-0.42 0.85,0.38, height 0.56
Shields_17x21 [mm]
  rect 5x1 smd: 1(0,8.5) 1(0,-8.5)
  Top Layer region: -2.35,-9 -8.965,-9 -9.937,-8.807 -10.761,-8.256 -11.312,-7.432 -11.505,-6.46 -11.505,-6.46 -11.505,0.087 -10.5,0.087 -10.5,-6.225 -10.365,-6.904 -9.98,-7.48 -9.404,-7.865 -8.725,-8 -8.725,-8 -2.35,-8
  Top Layer region: -2.35,9 -8.965,9 -9.937,8.807 -10.761,8.256 -11.312,7.432 -11.505,6.46 -11.505,6.46 -11.505,5.665 -10.5,5.665 -10.5,6.225 -10.365,6.904 -9.98,7.48 -9.404,7.865 -8.725,8 -8.725,8 -2.35,8
  Top Layer region: 2.35,-9 8.965,-9 9.937,-8.807 10.761,-8.256 11.312,-7.432 11.505,-6.46 11.505,-6.46 11.505,-4.019 10.5,-4.019 10.5,-6.225 10.262,-7.112 9.613,-7.762 8.725,-8 8.725,-8 2.35,-8
  Top Layer region: 2.35,9 8.965,9 9.937,8.807 10.761,8.256 11.312,7.432 11.505,6.46 11.505,6.46 11.505,3.994 10.5,3.994 10.5,6.225 10.365,6.904 9.98,7.48 9.404,7.865 8.725,8 8.725,8 2.35,8
  body extent -11.33,-8.8 11.33,8.8, height 2.6
SOD-323 [mm]
  rrect15% 0.85x0.45 smd paste+0 mask+0.05: AN(1.125,0) CA(-1.125,0)
  silkscreen extent -1.5,-0.7 0.9,0.7, body extent -1.3,-0.67 1.3,0.68, height 1.1
SOIC8 [mm]
  rrect50% 1.52x0.6 smd: 1(-2.74,1.905) 2(-2.74,0.635) 3(-2.74,-0.635) 4(-2.74,-1.905) 5(2.74,-1.905) 6(2.74,-0.635) 7(2.74,0.635) 8(2.74,1.905)
  silkscreen extent -2.87,-2.45 1.58,2.87, body extent -3,-2.45 3,2.45, height 1.75
SOIC-16#1 [mm]
  oval 0.6x1.9 smd: 1(-4.447,-4.752) 4(-0.637,-4.752) 5(0.633,-4.752) 6(1.903,-4.752) 7(3.173,-4.752) 8(4.443,-4.752) 10(3.173,4.748) 11(1.903,4.748) 14(-1.907,4.748) 15(-3.177,4.748) 16(-4.447,4.748)
  oval 0.5x1.9 smd: 2(-3.177,-4.752) 3(-1.907,-4.752) 12(0.633,4.748) 13(-0.637,4.748)
  oval 0.6x1.8 smd: 9(4.443,4.748)
  silkscreen extent -5.61,-4.87 5.25,3.4, body extent -5.25,-5.16 5.25,5.16, height 2.65
SOIC-16#2 [mm]
  oval 0.6x1.9 smd: 1(-4.447,-4.752) 4(-0.637,-4.752) 5(0.633,-4.752) 6(1.903,-4.752) 7(3.173,-4.752) 8(4.443,-4.752) 9(4.443,4.748) 10(3.173,4.748) 11(1.903,4.748) 12(0.632,4.748) 13(-0.637,4.748) 14(-1.907,4.748) 15(-3.177,4.748) 16(-4.447,4.748)
  oval 0.55x1.9 smd: 2(-3.177,-4.752) 3(-1.907,-4.752)
  silkscreen extent -5.34,-4.75 5.25,3.4, body extent -5.25,-5.16 5.25,5.16, height 2.65
SOT23-6 [mm]
  rrect50% 0.6x1 smd mask+0.05: 1(-0.95,-1.33) 2(0,-1.33) 3(0.95,-1.33) 4(0.95,1.33) 5(0,1.33) 6(-0.95,1.33)
  silkscreen extent -1.59,-0.88 1.59,0.86, body extent -1.52,-1.5 1.52,1.5, height 1.25
SOT-23 [mm] "SOT23, 3-Leads, Body 2.92x1.3mm, Pitch 1.9mm"
  rrect15% 0.9x0.6 smd mask+0.05: 1(1.1,-0.95) 2(1.1,0.95) 3(-1.1,0)
  silkscreen extent -0.7,-1.5 0.2,1.5, body extent -1.27,-1.5 1.28,1.5, height 1.15
SOT-223 [mm]
  rrect50% 1x2 smd mask+0.05: 1(-2.3,-3.2) 2(0,-3.2) 3(2.3,-3.2)
  rrect25% 3.25x2.15 smd mask+0.05: 2(0,3.2)
  silkscreen extent -3.22,-1.75 3.28,1.75, body extent -3.25,-3.48 3.25,3.48, height 1.68
SOT-416 [mm]
  rrect15% 0.35x0.5 smd mask+0.05: 1(-0.5,-0.65) 2(0.5,-0.65) 3(0,0.65)
  silkscreen extent -0.85,-0.05 0.85,0.45, body extent -0.8,-0.8 0.8,0.8, height 0.78
TSSOP-8 [mm] "Shrink Small Outline; 8 Leads; Body Width 4.4 mm; Pitch 0.65 mm"
  rrect50% 0.3x1.2 smd: 1(-0.975,-2.975) 2(-0.325,-2.975) 3(0.325,-2.975) 4(0.975,-2.975) 5(0.975,2.975) 6(0.325,2.975) 7(-0.325,2.975) 8(-0.975,2.975)
  silkscreen extent -1.8,-2.9 1.55,1.55, body extent -1.5,-3.2 1.5,3.2, height 1.2